# Altium PCB led_matrix_board.PcbDoc (part 1 of 2)
Units mm, origin at the board's own origin, x right, y up, seen from the top; angles counter-clockwise.
Board outline 57.94 x 73.23 mm, 4 copper layers (Top Layer, Layer 1, Layer 2, Bottom Layer), stack 0.974 mm thick; 32 components, 45 nets, 161 pads, 635 vias.
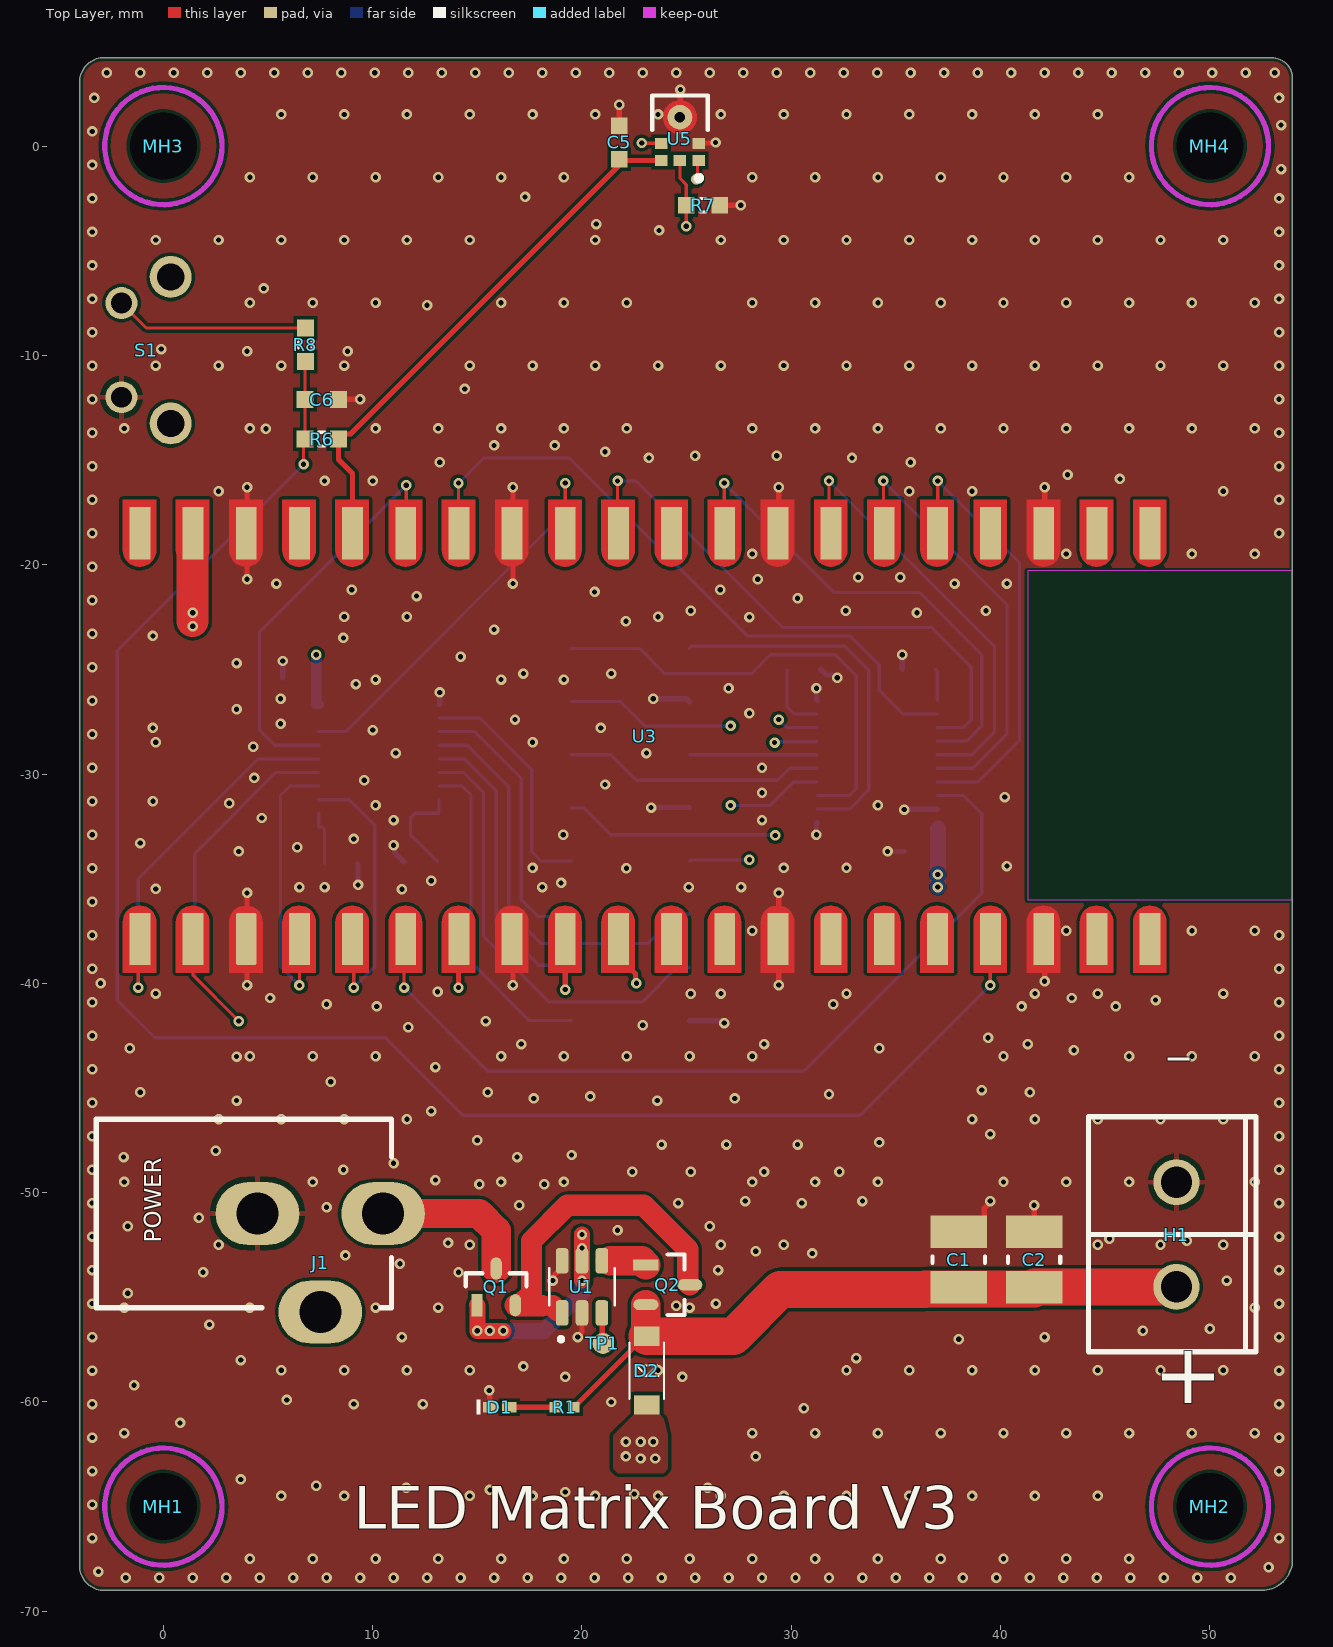
[diagram p0: Top Layer view]
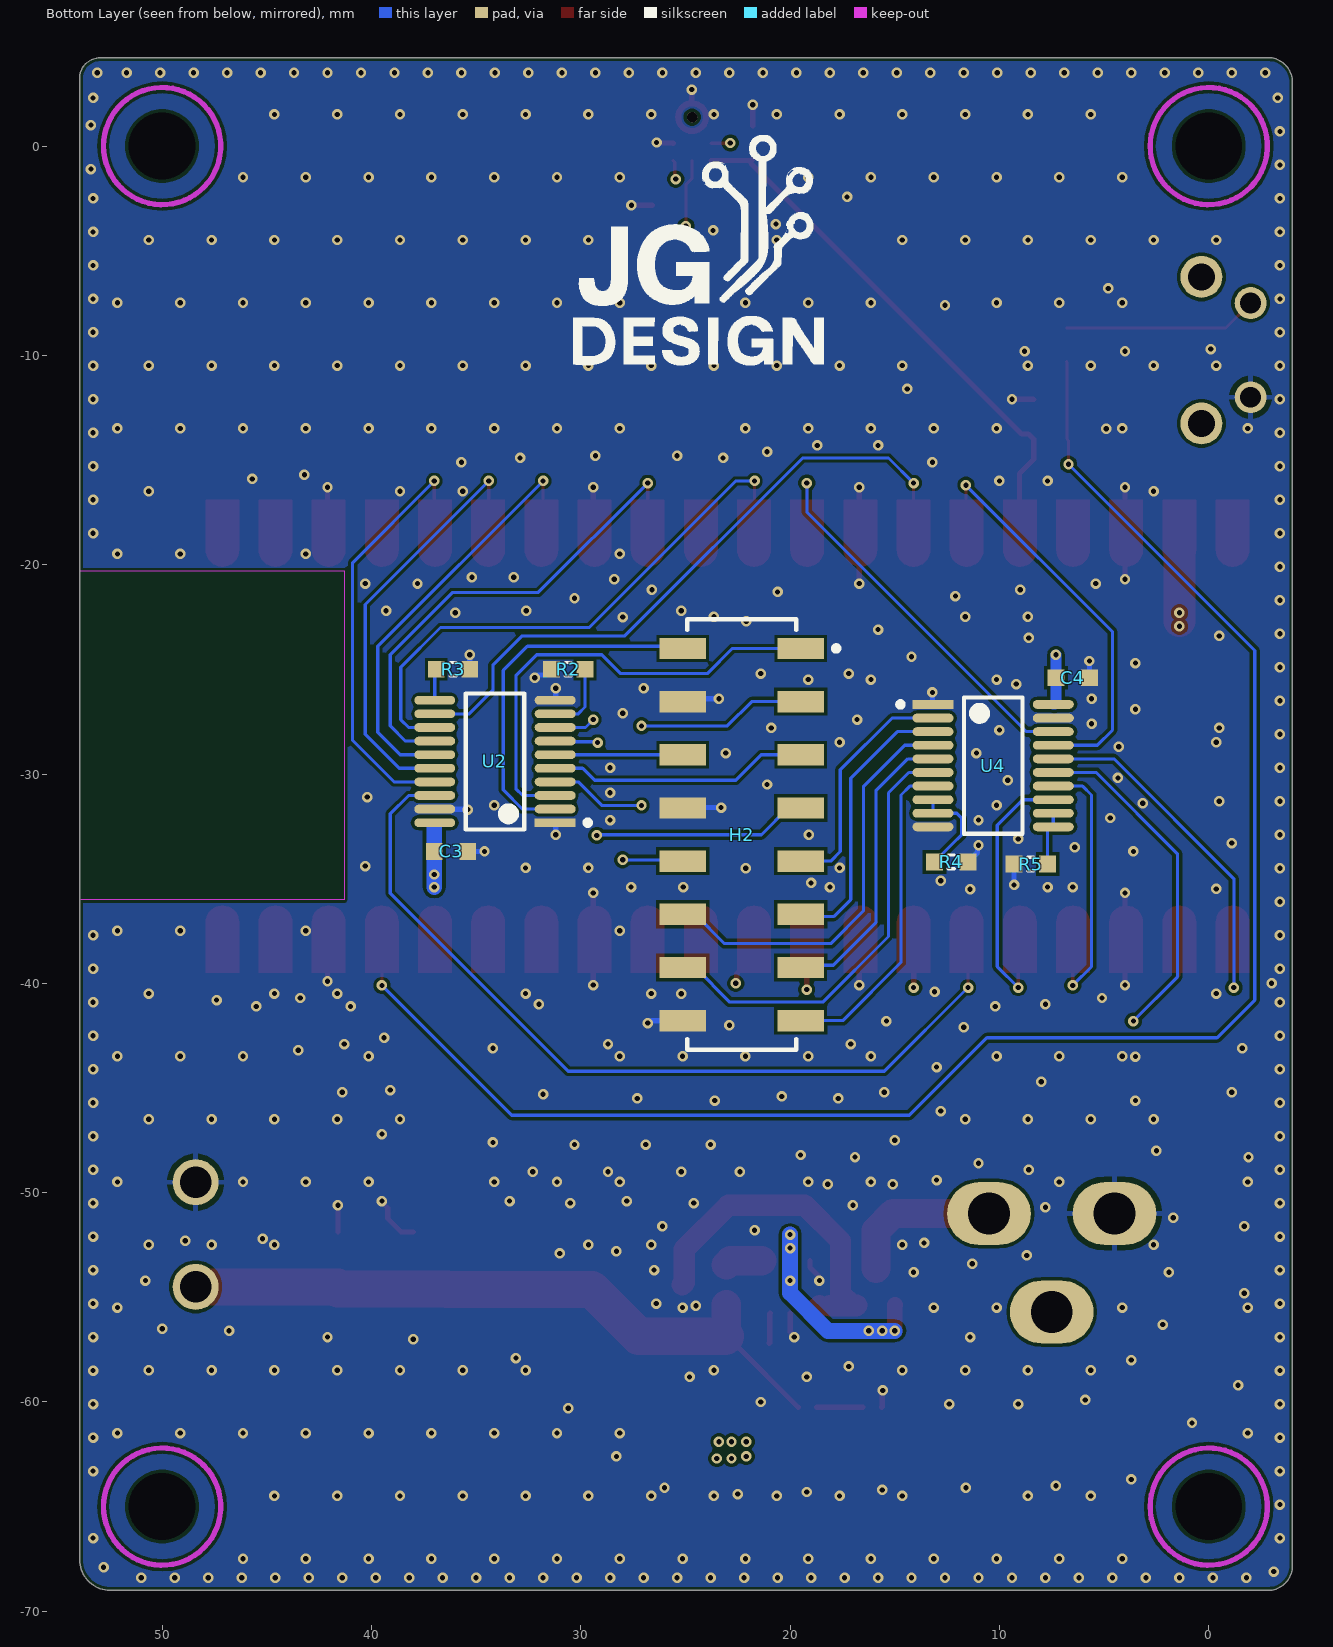
[diagram p1: Bottom Layer view, seen from below]
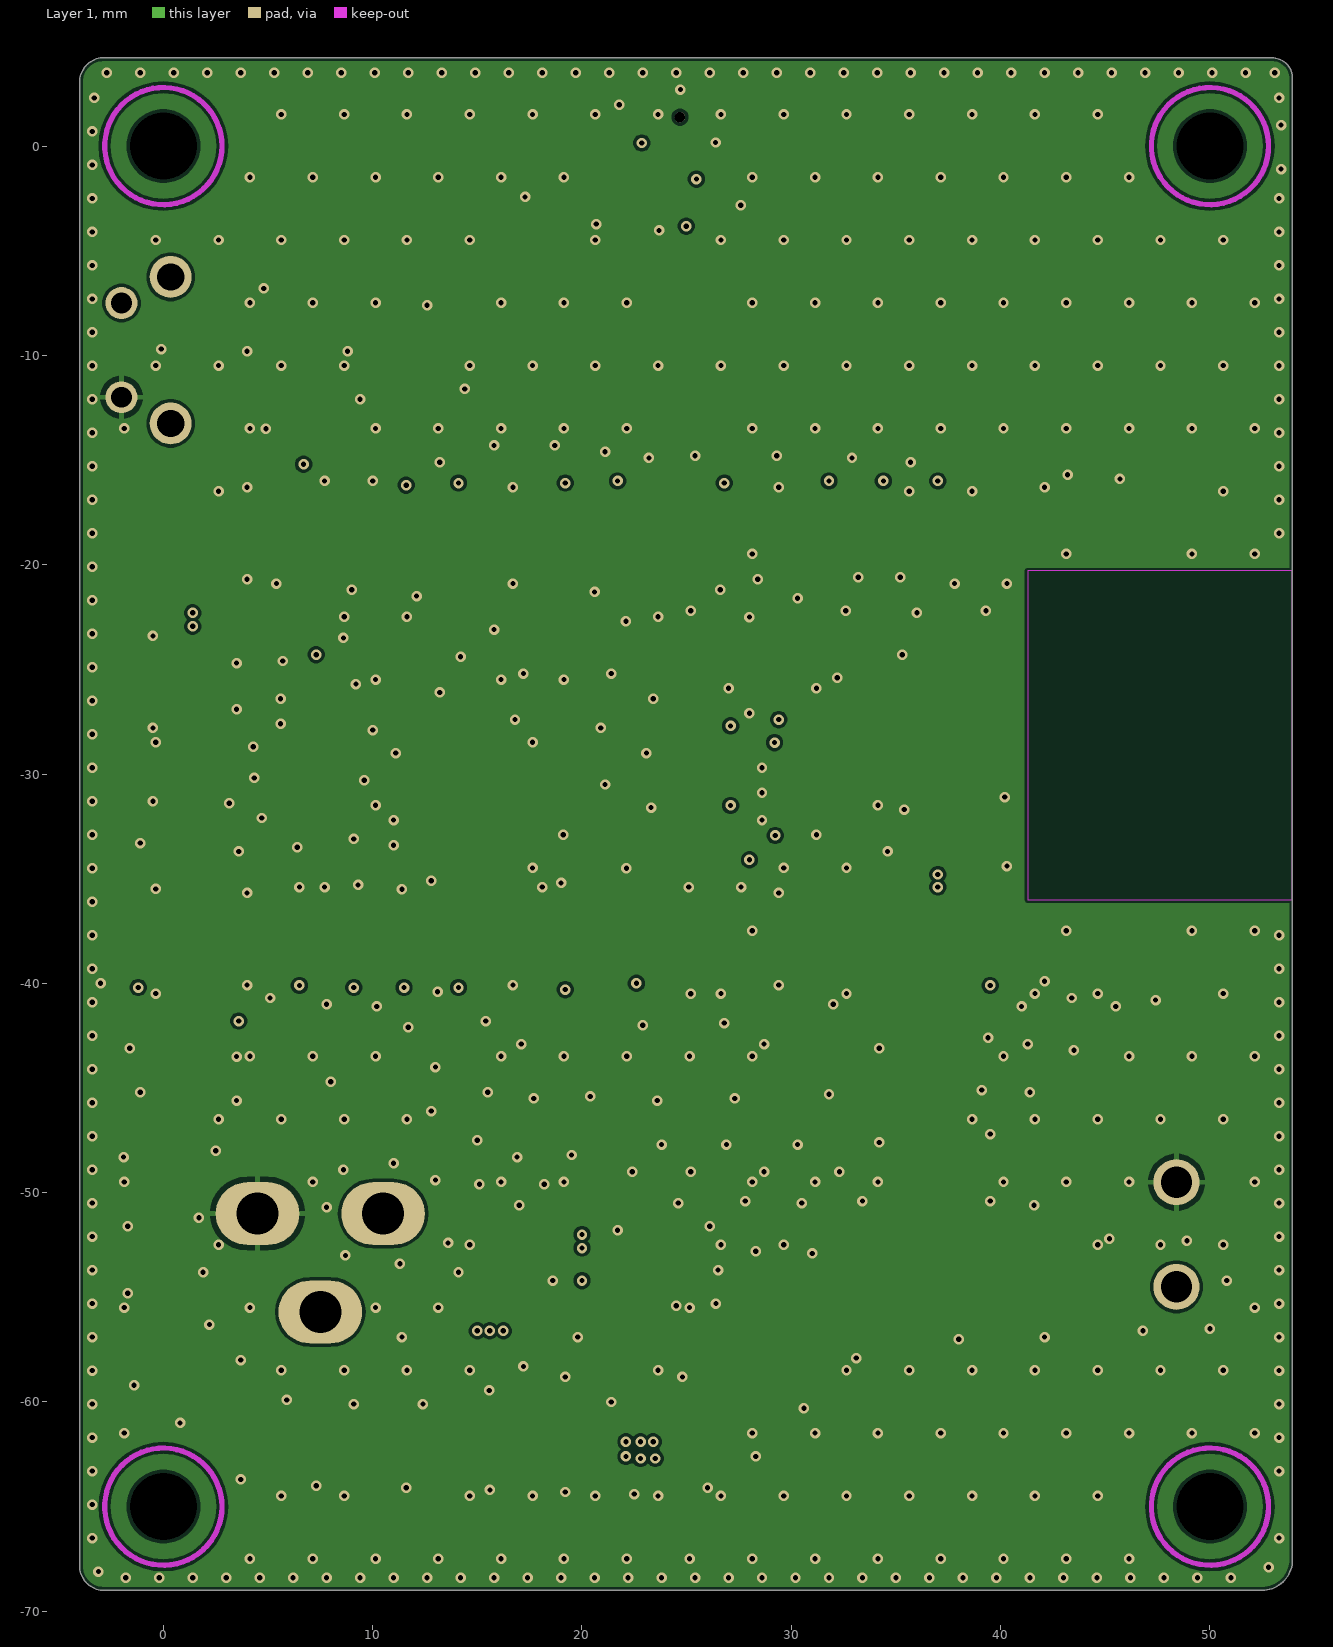
[diagram p2: Layer 1]
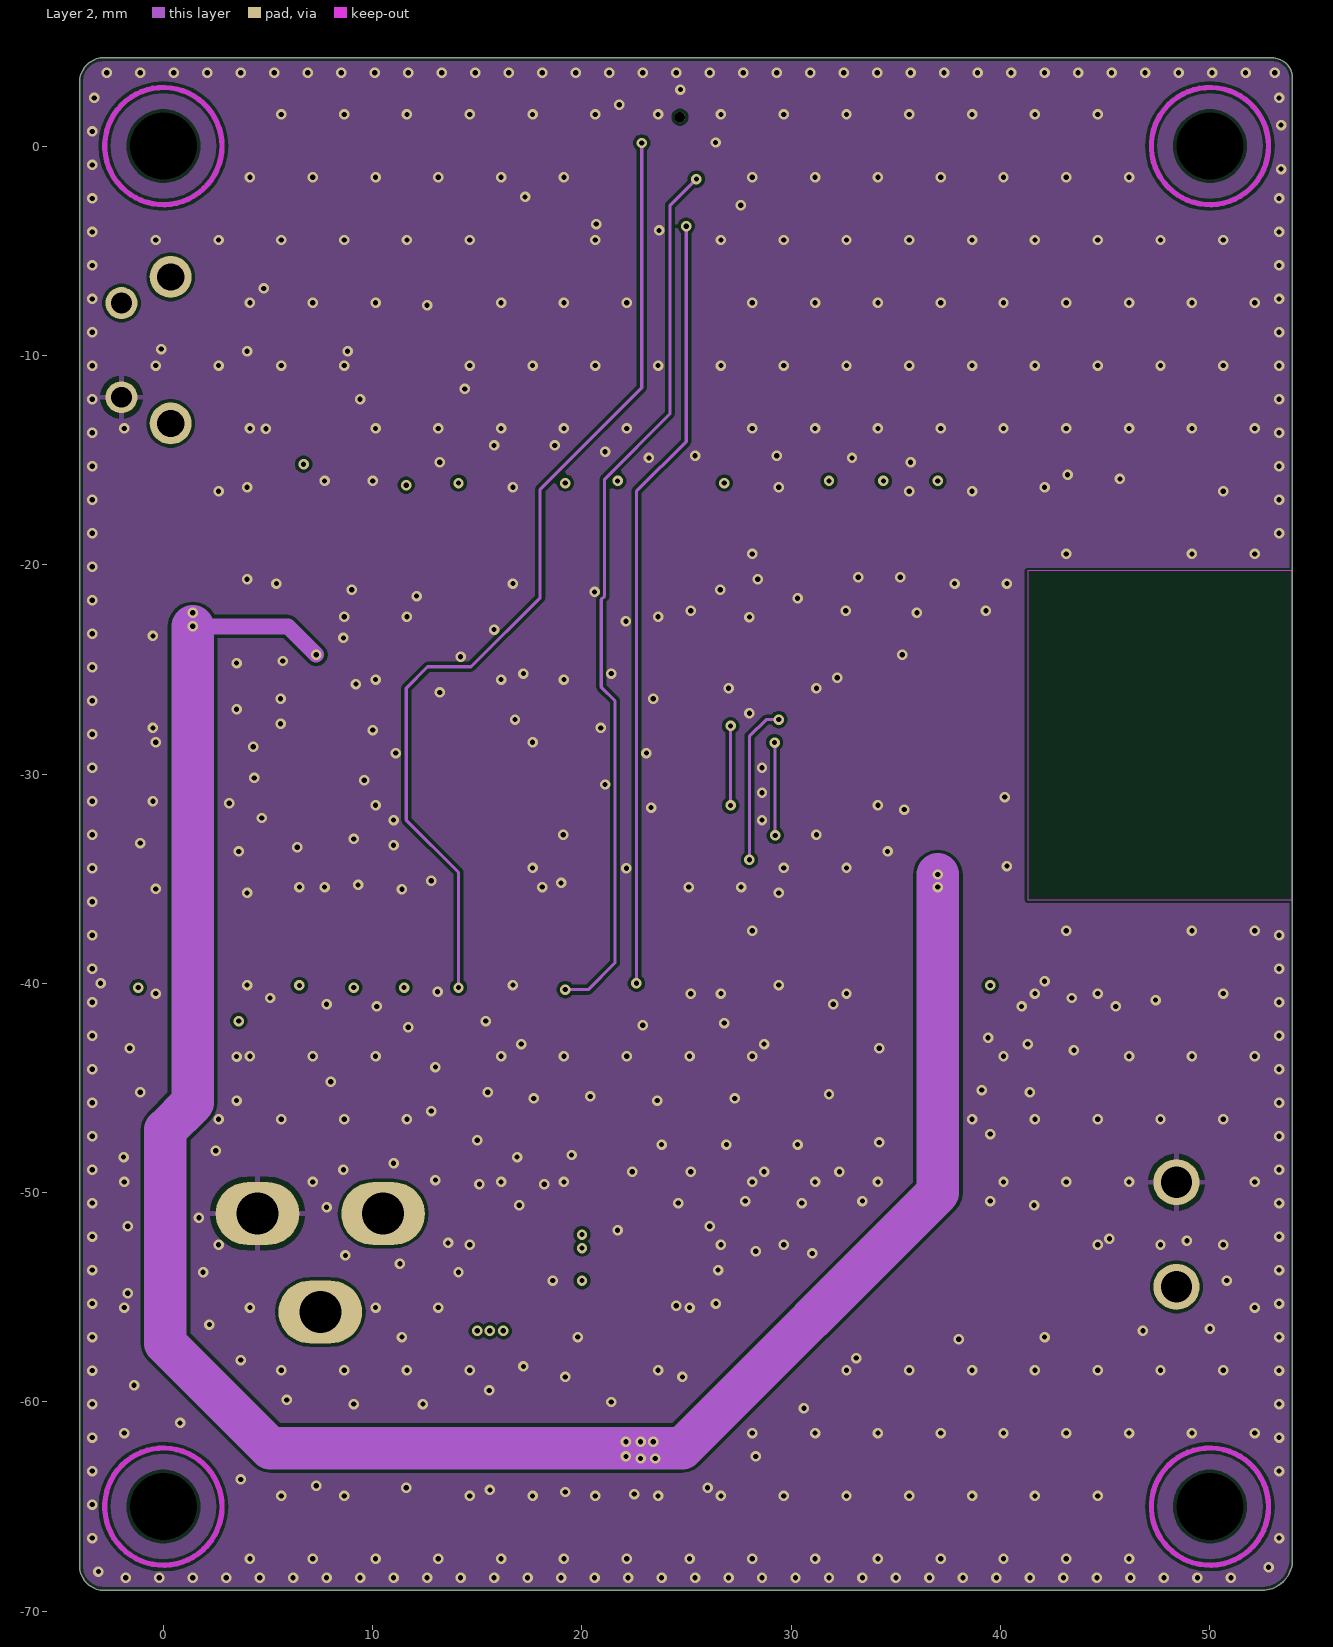
[diagram p3: Layer 2]
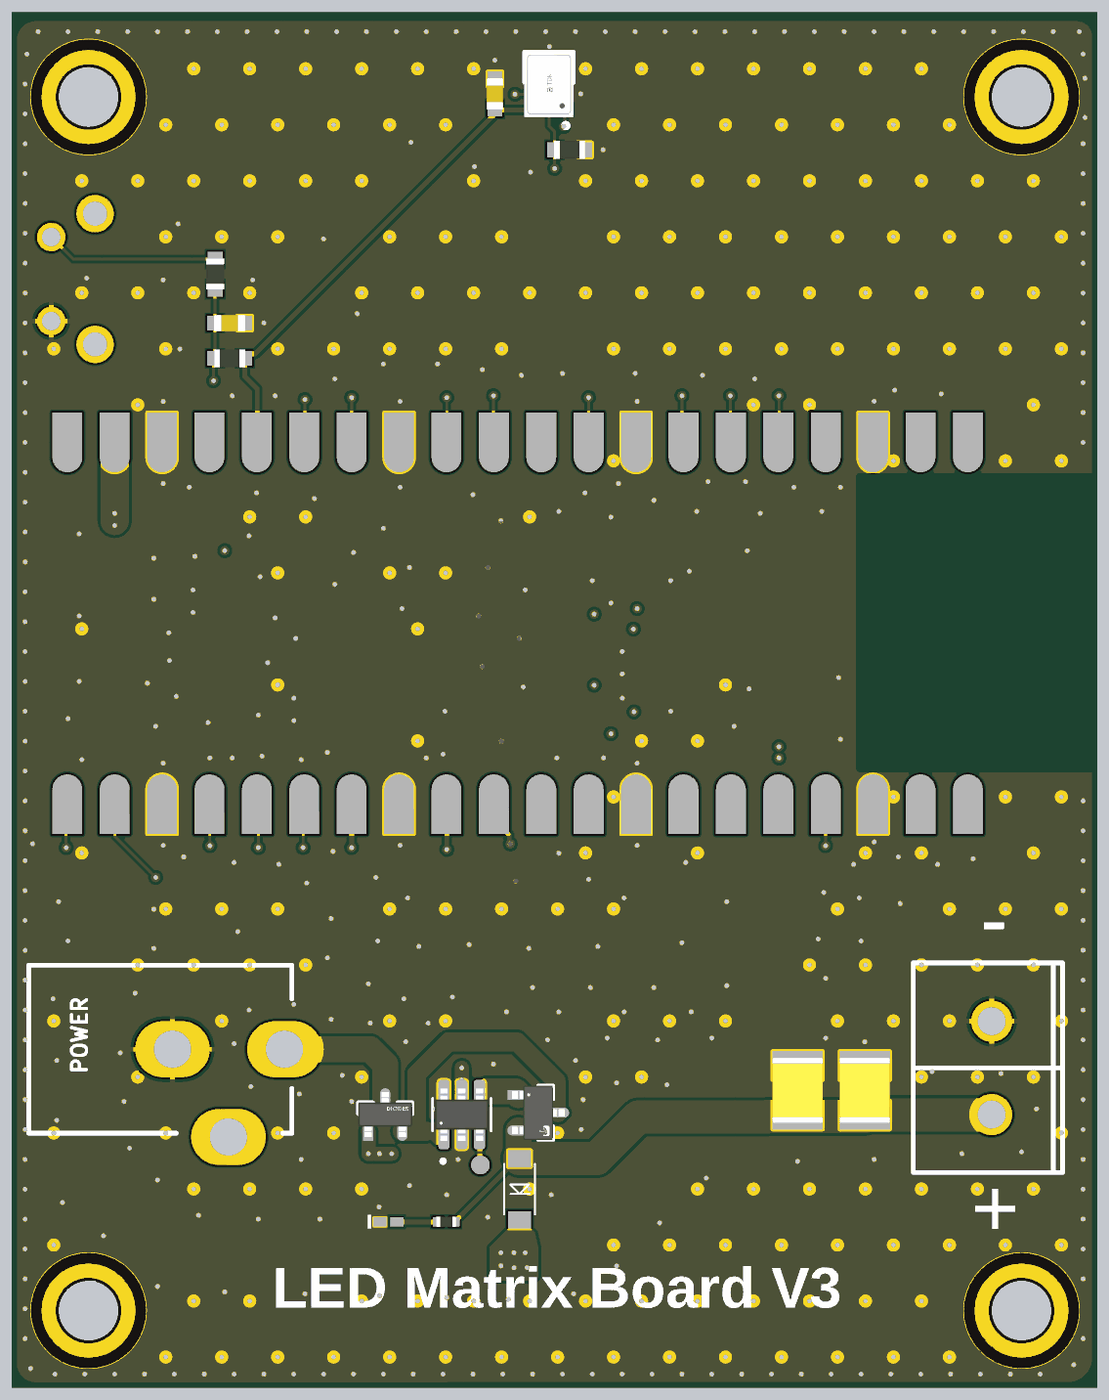
[diagram p4: 3D render of the assembled board from above, using the file's embedded part models]
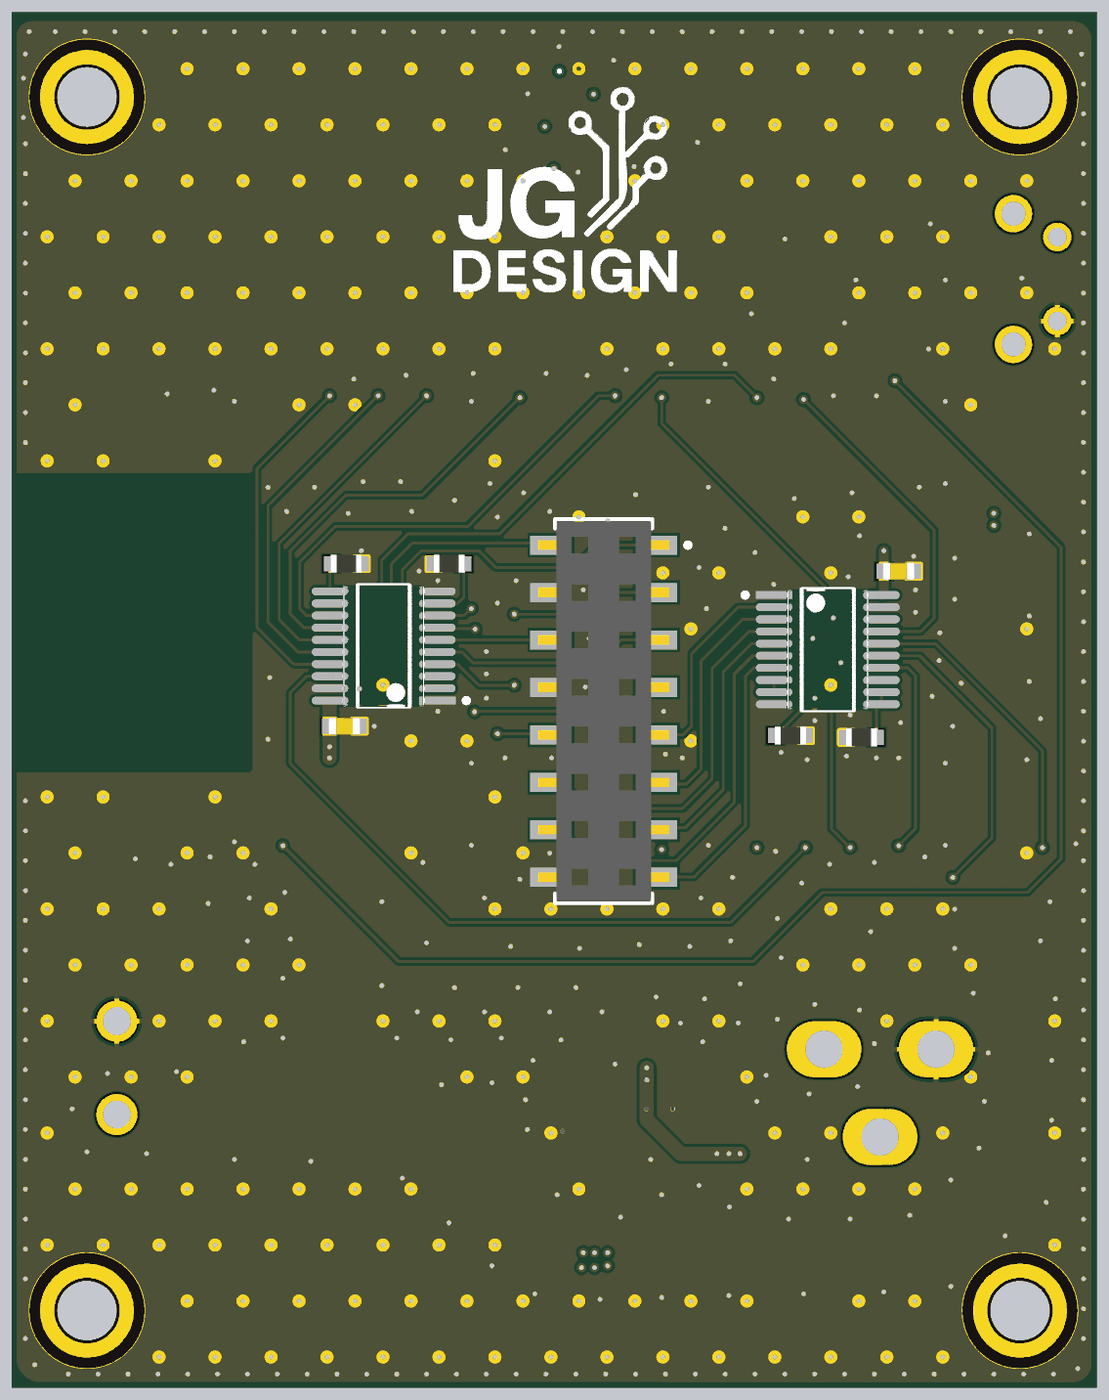
[diagram p5: 3D render of the assembled board from below, using the file's embedded part models]

## Layer stack, top to bottom
Top Solder: solder mask 0.02, PSR-4000-BN-Colour, Dk 4
Top Layer: signal copper 0.035
Dielectric 1: prepreg 0.0711, PP-006, Dk 4.1
Layer 1: signal copper 0.035
Dielectric 2: core 0.692, Core, Dk 4.29
Layer 2: signal copper 0.035
Dielectric 3: prepreg 0.0711, PP-006, Dk 4.1
Bottom Layer: signal copper 0.035
Bottom Solder: solder mask 0.02, PSR-4000-BN-Colour, Dk 4

## Board outline
-4,-67.824 ccw(c-2.824,-67.824) -2.824,-69 -2.827,-69 52.489,-69 52.489,-68.992 ccw(c52.489,-67.539) 53.942,-67.539 53.942,3.241 ccw(c52.967,3.241) 52.967,4.216 52.967,4.225 -2.824,4.225 ccw(c-2.824,3.049) -4,3.049

## Design rules (kind name [scope] priority, off if disabled: settings)
AcuteAngle [All] p1: minimum=4.50000000000000E+0001 checktracksonly=FALSE
AssemblyTestPointUsage [All] p1 off:
AssemblyTestpoint [All] p1 off: testpointundercomponent=TRUE minsize=1.016 maxsize=2.54 preferedsize=1.524 minholesize=0 maxholesize=1.016 preferedholesize=0.813 testpointgrid=0.025 usegrid=TRUE gridtolerance=0 allowsidetop=TRUE allowsidebottom=TRUE
BoardOutlineClearance BoardOutlineClearance_H2 [InComponent('H2')] p1: gap=0 ignorepadtopadclearanceinfootprint=FALSE
BoardOutlineClearance [(not OnTopSilkscreen) AND (NOT OnBottomSilkscreen) and (not OnMultiLayer)    and  (not IsText)] p2: gap=0.152 ignorepadtopadclearanceinfootprint=FALSE
Clearance Clearance_USB [InDifferentialPair('USB_D')] p1: gap=0.134 ignorepadtopadclearanceinfootprint=TRUE except(0.5: Arc-Poly Track-Poly SMDPad-Poly)
Clearance Clearance_RF_Poly [(InPolygon) vs InNetClass('RF-Net')] p2: gap=0.186 ignorepadtopadclearanceinfootprint=TRUE
Clearance Clearance_RF [InNetClass('RF-Net')] p3: gap=0.186 ignorepadtopadclearanceinfootprint=TRUE
Clearance [All] p4: gap=0.152 ignorepadtopadclearanceinfootprint=TRUE
ComponentClearance ComponentClearance_1 [All vs HasFootprint('FP-QPC02SXGN-RC-MFG')] p1: gap=0 collisioncheckmode=3 verticalgap=-0.025 showdistances=FALSE
ComponentClearance ComponentClearance_2 [All vs HasFootprint('TP_40_SMT')] p2: gap=0 collisioncheckmode=3 verticalgap=-0.025 showdistances=FALSE
ComponentClearance [All] p3: gap=0.254 collisioncheckmode=3 verticalgap=0.254 showdistances=FALSE
DiffPairsRouting [InDifferentialPair('USB_D')] p1: maxlimit=0.134 minlimit=0.134 mostfreqgap=0.134 toplayer_minwidth=0.28 toplayer_maxwidth=0.28 toplayer_prefwidth=0.28 midlayer1_minwidth=0.381 midlayer1_maxwidth=0.381 midlayer1_prefwidth=0.381 midlayer2_minwidth=0.381 midlayer2_maxwidth=0.381 midlayer2_prefwidth=0.381 bottomlayer_minwidth=0.28 bottomlayer_maxwidth=0.28 bottomlayer_prefwidth=0.28 impedanceprofiledriven=TRUE maxuncoupledlength=12.7
FabricationTestPointUsage [All] p1 off: valid=0 allowmultiple=FALSE
FabricationTestpoint [All] p1 off: side=3 testpointundercomponent=TRUE minsize=1.016 maxsize=2.54 preferedsize=1.524 minholesize=0 maxholesize=1.016 preferedholesize=0.813 testpointgrid=0.025 allowsidetop=TRUE allowsidebottom=TRUE usegrid=TRUE gridtolerance=0
FanoutControl Fanout_BGA [IsBGA] p1 off: bgadir=Out bgaviamode=Centered fanoutstyle=Auto fanoutdirection=Alternating viagrid=0.025 // Fanout_BGA (Default Rule)
FanoutControl Fanout_LCC [IsLCC] p2 off: bgadir=Out bgaviamode=Centered fanoutstyle=Auto fanoutdirection=Alternating viagrid=0.025 // Fanout_LCC (Default Rule)
FanoutControl Fanout_SOIC [IsSOIC] p3 off: bgadir=Out bgaviamode=Centered fanoutstyle=Auto fanoutdirection=Alternating viagrid=0.025 // Fanout_SOIC (Default Rule)
FanoutControl Fanout_Small [(CompPinCount < 5)] p4 off: bgadir=Out bgaviamode=Centered fanoutstyle=Auto fanoutdirection=OutThenIn viagrid=0.025 // Fanout_Small (Default Rule)
FanoutControl Fanout_Default [All] p5 off: bgadir=Out bgaviamode=Centered fanoutstyle=Auto fanoutdirection=Alternating viagrid=0.025 // Fanout_Default (Default Rule)
Height TP1 [InComponent('TP1')] p1: minheight=0 maxheight=12 prefheight=3
Height [All] p2 off: minheight=0 maxheight=25.4 prefheight=12.7
HoleSize [All] p1: absolutevalues=TRUE maxlimit=5.08 minlimit=0.2 maxpercent=80.000 minpercent=20.000
HoleToHoleClearance [All] p1: gap=0.203 allowstackedmicrovias=TRUE
LayerPairs [All] p1 off: enforce=TRUE
MatchedLengths MatchedLengths_QSPI [InNetClass('QSPI')] p1: tolerance=5 checknetsindiffpair=FALSE checkdiffpairvsdiffpair=TRUE checkxsignals=TRUE checkothers=TRUE
MatchedLengths MatchLengths_U1_Passives_J5 [InNetClass('SDIO')] p2: tolerance=2.54 checknetsindiffpair=FALSE checkdiffpairvsdiffpair=TRUE checkxsignals=TRUE checkothers=TRUE
MinimumSolderMaskSliver [not InComponent('H6')] p1: minsoldermaskwidth=0.06
PlaneClearance [All] p1: clearance=0.254
PlaneConnect [All] p1: pad.planeconnectstyle=Relief pad.reliefexpansion=0.508 pad.reliefentries=4 pad.reliefconductorwidth=0.254 pad.reliefairgap=0.254 via.planeconnectstyle=Direct via.reliefexpansion=0.508 via.reliefentries=4 via.reliefconductorwidth=0.254 via.reliefairgap=0.254
PolygonConnect [All] p1: thpad.connectstyle=Relief thpad.reliefconductorwidth=0.254 thpad.reliefentries=4 thpad.polygonreliefangle="90 Angle" thpad.airgapwidth=0.254 smdpad.connectstyle=Direct smdpad.reliefconductorwidth=0.254 smdpad.reliefentries=4 smdpad.polygonreliefangle="90 Angle" smdpad.airgapwidth=0.254 via.connectstyle=Direct via.reliefconductorwidth=0.254 via.reliefentries=4 via.polygonreliefangle="90 Angle" via.airgapwidth=0.254
RoutingVias [All] p1: holewidth=0.3 width=0.6 viastyle="Through Hole" minholewidth=0.2 minwidth=0.4 maxholewidth=0.711 maxwidth=1.27
SilkToSilkClearance [All] p1 off: silktosilkclearance=0.203
SilkToSolderMaskClearance [IsPad] p1 off: minsilkscreentomaskgap=0.102 clearancetoexposedcopper=TRUE
SolderMaskExpansion [All] p1: expansion=0.102 istentingtop=FALSE
SupplyNets "Schematic Supply Nets_1" [InNet('DC_IN')] p1: voltage=0.000
SupplyNets "Schematic Supply Nets" [InNet('+5V_OUT')] p2: voltage=0.000
SupplyNets "Schematic Supply Nets_7" [InNet('+5V')] p3: voltage=0.000
SupplyNets "Schematic Supply Nets_6" [InNet('+3V3')] p4: voltage=0.000
SupplyNets "Schematic Supply Nets_5" [InNet('GND')] p5: voltage=0.000
UnConnectedPin [All] p1 off:
UnRoutedNet [All] p1: checkbadconnections=TRUE
Width "RF Width" [InNetClass('RF-Net')] p1: maxlimit=0.9 minlimit=0.178 preferedwidth=0.8 toplayer_minwidth=0.8 toplayer_maxwidth=0.8 impedanceprofiledriven=TRUE impedanceprofileid={2BAD1660-FF1E-4629-AB45-93BC2CD73358} impedanceprofilevalue=50.000000 minimp=50.000000 maximp=50.000000 favimp=50.000000
Width [All] p2: maxlimit=2.54 minlimit=0.152 preferedwidth=0.254 midlayer1_prefwidth=0.203 midlayer2_prefwidth=0.203 minimp=50.000000 maximp=50.000000 favimp=50.000000
9 further rules are at their usual default settings.

## Classes and differential pairs
component class PCB_PATTERN: MH1 MH2 MH3 MH4 TP1
component class led_matrix_board: C1 C2 C3 C4 C5 C6 D1 D2 H1 H2 J1 MH1 MH2 MH3 MH4 Q1 Q2 R1 R5 R6 R7 R8 S1 TP1 U2 U4 U5
component class CHIP_OTHER: C1 C2 C3 C4 C5 C6 D1 R8
component class COMP_OTHER: D2 H1 J1 S1
component class CHIP_MICRO: R1 R5 R6 R7 R8

## Components (designator, comment, footprint, x,y, rotation, side; value= is the part's Value field where it differs from the comment)
C1 "CL32A107MPVNNNE" CAPC3225X20N 38,-53.2 r90 top value=100uF
C2 "CL32A107MPVNNNE" CAPC3225X20N 41.6,-53.2 r90 top value=100uF
C3 "C0603C104K8RACTU" 0603_cap 36.2,-33.7 r180 bottom value=100nF
C4 "C0603C104K8RACTU" 0603_cap 6.5,-25.4 r180 bottom value=100nF
C5 "C0603C104K8RACTU" 0603_cap 21.78,0.171 r90 top value=100nF
C6 "C0603C104K8RACTU" 0603_cap 7.565,-12.108 r0 top value=100nF
D1 "XZVGR68W-3" LED_0402_GREEN 16.069,-60.25 r180 top value=Green
D2 "MBR120VLSFT1" SOD-123FL 23.1,-58.5 r90 top value="MBR120VLSFT1, Schottky"
H1 "OSTTC020162" SCREW_TERM_2WAY_5MM 48.4,-54.5 r90 top
H2 "SSM-108-L-DV-K-TR" FP-SSM-108-L-DV-K-TR-MFG 22.31,-32.89 r270 bottom
J1 "PJ-102A" PJ-102A 4.5,-51 r0 top
MH1 "PAD0008" MH_600_320_NPTH 0,-65 r0 top
MH2 "PAD0008" MH_600_320_NPTH 50,-65 r0 top
MH3 "PAD0008" MH_600_320_NPTH 0,0 r0 top
MH4 "PAD0008" MH_600_320_NPTH 50,0 r0 top
Q1 "DMP3099L-7" FP-SOT23-IPC_C#1 15.9,-54.5 r90 top
Q2 "AO3400A" FP-SOT23-IPC_C#2 24.1,-54.4 r0 top
R1 "MCR01MZPF3300" 0402_res 19.169,-60.25 r0 top value=330R
R2 "ERJ-3GEY0R00V" 0603_res 30.6,-25 r180 bottom value=0R
R3 "ERJ-3GEY0R00V" 0603_res 36.1,-25 r0 bottom value=0R
R4 "ERJ-3GEY0R00V" 0603_res 12.3,-34.2 r0 bottom value=0R
R5 "ERJ-3GEY0R00V" 0603_res 8.5,-34.3 r0 bottom value=0R
R6 "0603WAF1002T5E" 0603_res 7.565,-14 r180 top value=10k
R7 "0603WAF1003T5E" 0603_res 25.78,-2.829 r0 top value=100k
R8 "ERA-3AEB102V" 0603_res 6.788,-9.49 r90 top value=1k
S1 "EVQ-PF206K" EVQ-PF206K 0.5,-9.75 r270 top
TP1 "PAD0035" TP_40_SMT 21,-57.2 r90 top
U1 "MAX4866LEUT+T" MAX4866LEUT+T-Footprint-1 20,-54.5 r90 top
U2 "SN74AHCT245PWR" FP-PW0020A-IPC_A 34.1,-29.4 r0 bottom
U3 "ESP32-S3-Pico" ESP32-S3-Pico -1.12,-37.88 r90 top
U4 "SN74AHCT245PWR" FP-PW0020A-IPC_A 10.3,-29.6 r180 bottom
U5 "ICS-43434" FP-ICS-43434-MFG 24.68,0.671 r90 top

## Footprints (in the part's own frame and the unit in brackets; to place one, negate y for a bottom-side part, rotate by r counter-clockwise, add the part's x,y. Pads: shape width x height; smd on the part's side, far side on the other; paste and mask are expansions set on the pad)
0402_res [mil]
  rect 22x20 smd: 1(-17,0) 2(17,0)
  body extent -21,-11 21,11, height 16
0603_cap [mm]
  rect 0.8x0.8 smd: 1(-0.8,0) 2(0.8,0)
  body extent -0.85,-0.45 0.85,0.45, height 0.9
0603_res [mm]
  rect 0.8x0.8 smd: 1(-0.8,0) 2(0.8,0)
  silkscreen extent -0.15,-0.33 0.15,0.33, body extent -0.82,-0.48 0.82,0.48, height 0.55
CAPC3225X20N [mm] "Chip Capacitor, 2-Leads, Body 3.20x2.50mm, IPC Medium Density"
  rect 1.55x2.7 smd: 1(-1.325,0) 2(1.325,0)
  silkscreen extent -0.15,-1.25 0.15,1.25, body extent -1.75,-1.35 1.75,1.35, height 2
ESP32-S3-Pico [mm]
  rect 2.5x1 smd mask+0.102: 1(0,0) 2(0,-2.54) 4(0,-7.62) 5(0,-10.16) 6(0,-12.7) 7(0,-15.24) 8(0,-17.78) 9(0,-20.32) 10(0,-22.86) 11(0,-25.4) 12(0,-27.94) 13(0,-30.48) 14(0,-33.02) 15(0,-35.56) 16(0,-38.1) 17(0,-40.64) 18(0,-43.18) 19(0,-45.72) 20(0,-48.26)
  rrect25% 2.5x1 smd mask+0.102: 3(0,-5.08)
  rect 2.5x1 smd: 21(19.38,-48.26) 22(19.38,-45.72) 23(19.38,-43.18) 24(19.38,-40.64) 25(19.38,-38.1) 26(19.38,-35.56) 27(19.38,-33.02) 28(19.38,-30.48) 29(19.38,-27.94) 30(19.38,-25.4) 31(19.38,-22.86) 32(19.38,-20.32) 33(19.38,-17.78) 34(19.38,-15.24) 35(19.38,-12.7) 36(19.38,-10.16) 37(19.38,-7.62) 38(19.38,-5.08) 39(19.38,-2.54) 40(19.38,0)
  Top Layer region: -1.602,-49.044 -1.602,-47.444 0.798,-47.444 0.798,-47.444 1.145,-47.523 1.423,-47.745 1.578,-48.066 1.578,-48.422 1.423,-48.743 1.145,-48.965 0.798,-49.044 0.798,-49.044
  Top Layer region: -1.602,-46.504 -1.602,-44.904 0.798,-44.904 0.798,-44.904 1.145,-44.983 1.423,-45.205 1.578,-45.526 1.578,-45.882 1.423,-46.203 1.145,-46.425 0.798,-46.504 0.798,-46.504
  Top Layer region: -1.602,-43.964 -1.602,-42.364 0.798,-42.364 0.798,-42.364 1.145,-42.443 1.423,-42.665 1.578,-42.986 1.578,-43.342 1.423,-43.663 1.145,-43.885 0.798,-43.964 0.798,-43.964
  Top Layer region: -1.602,-41.424 -1.602,-39.824 0.798,-39.824 0.798,-39.824 1.145,-39.903 1.423,-40.125 1.578,-40.446 1.578,-40.802 1.423,-41.123 1.145,-41.345 0.798,-41.424 0.798,-41.424
  Top Layer region: -1.602,-38.884 -1.602,-37.284 0.798,-37.284 0.798,-37.284 1.145,-37.363 1.423,-37.585 1.578,-37.906 1.578,-38.262 1.423,-38.583 1.145,-38.805 0.798,-38.884 0.798,-38.884
  Top Layer region: -1.602,-36.344 -1.602,-34.744 0.798,-34.744 0.798,-34.744 1.145,-34.823 1.423,-35.045 1.578,-35.366 1.578,-35.722 1.423,-36.043 1.145,-36.265 0.798,-36.344 0.798,-36.344
  Top Layer region: -1.602,-33.804 -1.602,-32.204 0.798,-32.204 0.798,-32.204 1.145,-32.283 1.423,-32.505 1.578,-32.826 1.578,-33.182 1.423,-33.503 1.145,-33.725 0.798,-33.804 0.798,-33.804
  Top Layer region: -1.602,-31.264 -1.602,-29.664 0.798,-29.664 0.798,-29.664 1.145,-29.743 1.423,-29.965 1.578,-30.286 1.578,-30.642 1.423,-30.963 1.145,-31.185 0.798,-31.264 0.798,-31.264
  Top Layer region: -1.602,-28.724 -1.602,-27.124 0.798,-27.124 0.798,-27.124 1.145,-27.203 1.423,-27.425 1.578,-27.746 1.578,-28.102 1.423,-28.423 1.145,-28.645 0.798,-28.724 0.798,-28.724
  Top Layer region: -1.602,-26.184 -1.602,-24.584 0.798,-24.584 0.798,-24.584 1.145,-24.663 1.423,-24.885 1.578,-25.206 1.578,-25.562 1.423,-25.883 1.145,-26.105 0.798,-26.184 0.798,-26.184
  Top Layer region: -1.602,-23.644 -1.602,-22.044 0.798,-22.044 0.798,-22.044 1.145,-22.123 1.423,-22.345 1.578,-22.666 1.578,-23.022 1.423,-23.343 1.145,-23.565 0.798,-23.644 0.798,-23.644
  Top Layer region: -1.602,-21.104 -1.602,-19.504 0.798,-19.504 0.798,-19.504 1.145,-19.583 1.423,-19.805 1.578,-20.126 1.578,-20.482 1.423,-20.803 1.145,-21.025 0.798,-21.104 0.798,-21.104
  Top Layer region: -1.602,-18.564 -1.602,-16.964 0.798,-16.964 0.798,-16.964 1.145,-17.043 1.423,-17.265 1.578,-17.586 1.578,-17.942 1.423,-18.263 1.145,-18.485 0.798,-18.564 0.798,-18.564
  Top Layer region: -1.602,-16.024 -1.602,-14.424 0.798,-14.424 0.798,-14.424 1.145,-14.503 1.423,-14.725 1.578,-15.046 1.578,-15.402 1.423,-15.723 1.145,-15.945 0.798,-16.024 0.798,-16.024
  Top Layer region: -1.602,-5.864 -1.602,-4.264 0.798,-4.264 0.798,-4.264 1.145,-4.343 1.423,-4.565 1.578,-4.886 1.578,-5.242 1.423,-5.563 1.145,-5.785 0.798,-5.864 0.798,-5.864
  Top Layer region: 20.982,-0.784 20.982,0.816 18.582,0.816 18.582,0.816 18.235,0.737 17.957,0.515 17.802,0.194 17.802,-0.162 17.957,-0.483 18.235,-0.705 18.582,-0.784 18.582,-0.784
  Top Layer region: 20.982,-5.864 20.982,-4.264 18.582,-4.264 18.582,-4.264 18.235,-4.343 17.957,-4.565 17.802,-4.886 17.802,-5.242 17.957,-5.563 18.235,-5.785 18.582,-5.864 18.582,-5.864
  Top Layer region: 20.982,-8.404 20.982,-6.804 18.582,-6.804 18.582,-6.804 18.235,-6.883 17.957,-7.105 17.802,-7.426 17.802,-7.782 17.957,-8.103 18.235,-8.325 18.582,-8.404 18.582,-8.404
  Top Layer region: 20.982,-10.944 20.982,-9.344 18.582,-9.344 18.582,-9.344 18.235,-9.423 17.957,-9.645 17.802,-9.966 17.802,-10.322 17.957,-10.643 18.235,-10.865 18.582,-10.944 18.582,-10.944
  Top Layer region: 20.982,-18.564 20.982,-16.964 18.582,-16.964 18.582,-16.964 18.235,-17.043 17.957,-17.265 17.802,-17.586 17.802,-17.942 17.957,-18.263 18.235,-18.485 18.582,-18.564 18.582,-18.564
  Top Layer region: 20.982,-26.184 20.982,-24.584 18.582,-24.584 18.582,-24.584 18.235,-24.663 17.957,-24.885 17.802,-25.206 17.802,-25.562 17.957,-25.883 18.235,-26.105 18.582,-26.184 18.582,-26.184
  Top Layer region: 20.982,-31.264 20.982,-29.664 18.582,-29.664 18.582,-29.664 18.235,-29.743 17.957,-29.965 17.802,-30.286 17.802,-30.642 17.957,-30.963 18.235,-31.185 18.582,-31.264 18.582,-31.264
  Top Layer region: 20.982,-41.424 20.982,-39.824 18.582,-39.824 18.582,-39.824 18.235,-39.903 17.957,-40.125 17.802,-40.446 17.802,-40.802 17.957,-41.123 18.235,-41.345 18.582,-41.424 18.582,-41.424
  Top Layer region: 20.982,-43.964 20.982,-42.364 18.582,-42.364 18.582,-42.364 18.235,-42.443 17.957,-42.665 17.802,-42.986 17.802,-43.342 17.957,-43.663 18.235,-43.885 18.582,-43.964 18.582,-43.964
  Top Layer region: 20.982,-46.504 20.982,-44.904 18.582,-44.904 18.582,-44.904 18.235,-44.983 17.957,-45.205 17.802,-45.526 17.802,-45.882 17.957,-46.203 18.235,-46.425 18.582,-46.504 18.582,-46.504
  Top Layer region: 20.982,-49.044 20.982,-47.444 18.582,-47.444 18.582,-47.444 18.235,-47.523 17.957,-47.745 17.802,-48.066 17.802,-48.422 17.957,-48.743 18.235,-48.965 18.582,-49.044 18.582,-49.044
  Top Layer region: 20.982,-23.644 20.982,-22.044 18.582,-22.044 18.582,-22.044 18.235,-22.123 17.957,-22.345 17.802,-22.666 17.802,-23.022 17.957,-23.343 18.235,-23.565 18.582,-23.644 18.582,-23.644
  Top Layer region: 20.982,-33.804 20.982,-32.204 18.582,-32.204 18.582,-32.204 18.235,-32.283 17.957,-32.505 17.802,-32.826 17.802,-33.182 17.957,-33.503 18.235,-33.725 18.582,-33.804 18.582,-33.804
  Top Layer region: -1.602,-8.404 -1.602,-6.804 0.798,-6.804 0.798,-6.804 1.145,-6.883 1.423,-7.105 1.578,-7.426 1.578,-7.782 1.423,-8.103 1.145,-8.325 0.798,-8.404 0.798,-8.404
  Top Layer region: 20.982,-13.484 20.982,-11.884 18.582,-11.884 18.582,-11.884 18.235,-11.963 17.957,-12.185 17.802,-12.506 17.802,-12.862 17.957,-13.183 18.235,-13.405 18.582,-13.484 18.582,-13.484
  Top Layer region: 20.982,-28.724 20.982,-27.124 18.582,-27.124 18.582,-27.124 18.235,-27.203 17.957,-27.425 17.802,-27.746 17.802,-28.102 17.957,-28.423 18.235,-28.645 18.582,-28.724 18.582,-28.724
  Top Layer region: 20.982,-36.344 20.982,-34.744 18.582,-34.744 18.582,-34.744 18.235,-34.823 17.957,-35.045 17.802,-35.366 17.802,-35.722 17.957,-36.043 18.235,-36.265 18.582,-36.344 18.582,-36.344
  Top Layer region: 20.982,-38.884 20.982,-37.284 18.582,-37.284 18.582,-37.284 18.235,-37.363 17.957,-37.585 17.802,-37.906 17.802,-38.262 17.957,-38.583 18.235,-38.805 18.582,-38.884 18.582,-38.884
  Top Layer region: -1.602,-3.324 -1.602,-1.724 0.798,-1.724 0.798,-1.724 1.145,-1.803 1.423,-2.025 1.578,-2.346 1.578,-2.702 1.423,-3.023 1.145,-3.245 0.798,-3.324 0.798,-3.324
  Top Layer region: -1.602,-13.484 -1.602,-11.884 0.798,-11.884 0.798,-11.884 1.145,-11.963 1.423,-12.185 1.578,-12.506 1.578,-12.862 1.423,-13.183 1.145,-13.405 0.798,-13.484 0.798,-13.484
  Top Layer region: 20.982,-21.104 20.982,-19.504 18.582,-19.504 18.582,-19.504 18.235,-19.583 17.957,-19.805 17.802,-20.126 17.802,-20.482 17.957,-20.803 18.235,-21.025 18.582,-21.104 18.582,-21.104
  Top Layer region: -1.602,-10.944 -1.602,-9.344 0.798,-9.344 0.798,-9.344 1.145,-9.423 1.423,-9.645 1.578,-9.966 1.578,-10.322 1.423,-10.643 1.145,-10.865 0.798,-10.944 0.798,-10.944
  Top Layer region: 20.982,-16.024 20.982,-14.424 18.582,-14.424 18.582,-14.424 18.235,-14.503 17.957,-14.725 17.802,-15.046 17.802,-15.402 17.957,-15.723 18.235,-15.945 18.582,-16.024 18.582,-16.024
  Top Layer region: 20.982,-3.324 20.982,-1.724 18.582,-1.724 18.582,-1.724 18.235,-1.803 17.957,-2.025 17.802,-2.346 17.802,-2.702 17.957,-3.023 18.235,-3.245 18.582,-3.324 18.582,-3.324
  Top Layer region: -1.602,-0.784 -1.602,0.816 0.798,0.816 0.798,0.816 1.145,0.737 1.423,0.515 1.578,0.194 1.578,-0.162 1.423,-0.483 1.145,-0.705 0.798,-0.784 0.798,-0.784
EVQ-PF206K [mm]
  round 2 hole 1.3: 0(-3.5,-0.15) 0(3.5,-0.15)
  round 1.524 hole 1: 1(-2.25,-2.5) 2(2.25,-2.5)
  body extent -3.75,-8.35 3.75,1.5, height 7.4
FP-ICS-43434-MFG [mm]
  rect 0.522x0.6 smd paste-1000 mask+0: 1(-1.364,-0.9) 2(-0.542,-0.9) 4(-0.542,0.9) 5(-1.364,0.9) 6(-1.364,0)
  round 1.178 smd paste-1000 mask-1000: 3(0.71,0)
  round 0.5 hole 0.5 unplated paste-2539.97 mask+0: ""(0.71,0)
  Top Layer circle w0.3: c0.71,0 r0.663
  silkscreen extent -2.32,-1.33 1.75,1.33, body extent -2.25,-1.83 2.25,1.83, height 0.25
FP-PW0020A-IPC_A [mm]
  rect 1.955x0.421 smd paste+0 mask+0: 1(-2.875,2.925)
  rrect100% 1.955x0.421 smd paste+0 mask+0: 2(-2.875,2.275) 3(-2.875,1.625) 4(-2.875,0.975) 5(-2.875,0.325) 6(-2.875,-0.325) 7(-2.875,-0.975) 8(-2.875,-1.625) 9(-2.875,-2.275) 10(-2.875,-2.925) 11(2.875,-2.925) 12(2.875,-2.275) 13(2.875,-1.625) 14(2.875,-0.975) 15(2.875,-0.325) 16(2.875,0.325) 17(2.875,0.975) 18(2.875,1.625) 19(2.875,2.275) 20(2.875,2.925)
  silkscreen extent -4.55,-3.25 1.4,3.25, body extent -3.2,-3.25 3.2,3.25, height 1.2
FP-SOT23-IPC_C#1 [mm]
  rect 1.059x0.547 smd paste+0 mask+0: 1(-0.877,0.915)
  rrect100% 1.059x0.547 smd paste+0 mask+0: 2(-0.877,-0.915) 3(0.877,0)
  silkscreen extent 0.03,-1.45 0.65,1.45, body extent -1.51,-1.55 1.51,1.55, height 0.25
FP-SOT23-IPC_C#2 [mm]
  rect 1.205x0.532 smd paste+0 mask+0: 1(-1.05,0.95)
  rrect100% 1.205x0.532 smd paste+0 mask+0: 2(-1.05,-0.95) 3(1.05,0)
  silkscreen extent 0,-1.45 0.8,1.45, body extent -1.75,-1.55 1.75,1.55, height 0.25
FP-SSM-108-L-DV-K-TR-MFG [mm]
  rect 1.02x2.22 smd paste+0 mask+0: 1(-8.89,2.825) 2(-8.89,-2.825) 3(-6.35,2.825) 4(-6.35,-2.825) 5(-3.81,2.825) 6(-3.81,-2.825) 7(-1.27,2.825) 8(-1.27,-2.825) 9(1.27,2.825) 10(1.27,-2.825) 11(3.81,2.825) 12(3.81,-2.825) 13(6.35,2.825) 14(6.35,-2.825) 15(8.89,2.825) 16(8.89,-2.825)
  silkscreen extent -10.29,-2.61 10.29,4.63, body extent -10.16,-3.51 10.16,3.51, height 7.46
LED_0402_GREEN [mm]
  rect 0.7x0.5 smd mask+0.051: A(-0.45,0) K(0.45,0)
  silkscreen extent 0.92,-0.38 1.1,0.35, body extent -0.5,-0.25 0.5,0.25, height 0.51
MAX4866LEUT+T-Footprint-1 [mm]
  rrect50% 1.22x0.6 smd paste+0 mask+0.102: 1(-1.245,0.95) 2(-1.245,0) 3(-1.245,-0.95) 4(1.245,-0.95) 5(1.245,0) 6(1.245,0.95)
  silkscreen extent -2.6,-1.57 0.88,1.57, body extent -1.4,-1.45 1.4,1.45, height 1.45
MH_600_320_NPTH [mm] "600x320 Non-plated mount hole"
  round 3 hole 3.2 unplated mask+1.625: 1(0,0)
  Keep-Out Layer circle w0.254: c0,0 r2.8
PJ-102A [mm]
  oval 4x3 hole 2: +(6,0) -(0,0) SW(3,-4.7)
  silkscreen extent -7.7,-4.5 6.4,4.5, body extent -7.7,-4.9 6.4,4.5, height 11
SCREW_TERM_2WAY_5MM [mm]
  round 2.2 hole 1.5: 1(0,0) 2(5,0)
  silkscreen extent -3.1,-3.8 8.12,4.2, body extent -3.1,-3.3 8.1,4.2, height 8.5
SOD-123FL [mm] "Surface Mount Schottky Diode"
  rect 0.91x1.22 smd: A(1.64,0) K(-1.64,0)
  silkscreen extent -1.35,-0.82 1.35,0.82, body extent -1.8,-0.82 1.8,0.82, height 1.01
TP_40_SMT [mm]
  round 1 smd: 1(0,0)

## Part data
C1 C2: library part CAP0047-3, "CAP CER 100UF 10V ±20% X5R 1210", Component Rating=X5R, Package=1210, Tolerance=20%, Voltage=10V, ClassName=CHIP_OTHER, Generic Allowed=Yes, Subtype=Ceramic
C3 C4 C5 C6: library part CAP0030-8, "CAP CER 100NF 10V ±10% X7R 0603", Component Rating=X7R, Package=0603, Tolerance=10%, Voltage=10V, ClassName=CHIP_OTHER, Generic Allowed=Yes, Subtype=Ceramic
D1: library part DIO0053-6, "LED GREEN 0402 SMD", Package=0402, Voltage=2.0V, ClassName=CHIP_OTHER, Generic Allowed=Yes
D2: library part DIO0005-3, "Diodes, MBR120VLSFT1 Schottky 1A 20V, Vf=0.34V", Component Rating=Vf=0.34V, Current=1A, Package=SOD-123FL, Voltage=20V, ClassName=COMP_OTHER, Generic Allowed=No
H1: library part JCK0020-1, "CONN TERM BLOCK 5MM 2POS", Package=THRU-Hole, ClassName=COMP_OTHER, Generic Allowed=Yes
H2: library part HDR0162-1, "PCB Receptacle, Board-to-Board, 2.54 mm, 2 Rows, 16 Contacts, Surface Mount", Color=Black, Current Rating=5.2A, Dielectric Material=Polyamide, Manufacturer Lifecycle Status=PRODUCTION, Max Operating Temperature=125°C, Min Operating Temperature=-55°C, Voltage Rating=572V, Connector Type="Header, Socket", Contact Gender=Female, Contact Material="Gold, Nickel", Contact Plating=Gold, Gender=Receptacle, Height=7.46mm, Housing Color=Black, Housing Material=Nylon, Lead Free="Lead Free", Length=20.8mm, Lifecycle Status=Production, Mounting Technology="Surface Mount", Number of Contacts=16, Number of Positions=16, Number of Rows=2, Packaging="Tape and Reel", Pins=16, Pitch=2.54mm, REACH SVHC=No, RoHS=Compliant, Row Spacing=2.54mm, Terminal Pitch=2.54mm, Termination=Solder, Width=5mm
J1: library part JCK0011-1, "Conn Power Jack 2.1mm PCB Mount Thru-Hole", Package=THRU-Hole, ClassName=COMP_OTHER, Generic Allowed=No
MH1 MH2 MH3 MH4: library part PAD0008-2, "MH 6.00MM DIA 3.2MM HOLE NPTH", ClassName=PCB_PATTERN, Shape=Round
Q1: library part TSR0027-1, "DMP3099L Series 30 V 65 mOhm P-Channel Enhancement Mode Mosfet - SOT-23-3", Case/Package=SOT-23, Continuous Drain Current (ID)=3.8A, Drain to Source Breakdown Voltage=-30V, Drain to Source Resistance=65mΩ, Gate to Source Voltage (Vgs)=20V, Input Capacitance=563pF, Max Junction Temperature (Tj)=150°C, Max Power Dissipation=1.08W, Min Breakdown Voltage=30V, Min Operating Temperature=-55°C, Threshold Voltage=-2.1V, China RoHS=Compliant, Contact Plating=Tin, Drain to Source Voltage (Vdss)=-30V, Element Configuration=Single, Export Control Classification Number (ECCN) Code=EAR99, Fall Time=15ns, Height=1.1mm, Introduction Date=2013-05-28, Lead Free="Lead Free", Length=3mm, Lifecycle Status=Production, Max Operating Temperature=150°C, Mounting Technology="Surface Mount", Number of Channels=1, Number of Elements=1, Number of Terminals=3, Pins=3, Power Dissipation=1.08W, Radiation Hardening=No, Rds On Max=65mΩ, REACH SVHC=Yes, Rise Time=5ns, RoHS=Compliant, Schedule B="8541290080, 8541290080", Turn-Off Delay Time=31ns, Turn-On Delay Time=4.8ns, Weight=7.994566mg, Width=1.4mm
Q2: library part TSR0028-1, "Trans MOSFET N-CH 30V 5.7A 3-Pin SOT-23", Case/Package=SOT-23, Continuous Drain Current (ID)=5.7A, Drain to Source Breakdown Voltage=30V, Drain to Source Resistance=26.5mΩ, Gate to Source Voltage (Vgs)=12V, Input Capacitance=630pF, Max Junction Temperature (Tj)=150°C, Max Power Dissipation=1.4W, Min Operating Temperature=-55°C, Threshold Voltage=650mV, Drain to Source Voltage (Vdss)=30V, Export Control Classification Number (ECCN) Code=EAR99, Height=1.25mm, Introduction Date=2007-04-17, Lead Free="Lead Free", Lifecycle Status=Production, Max Operating Temperature=150°C, Min Breakdown Voltage=30V, Mounting Technology="Surface Mount", Number of Channels=1, Number of Elements=1, Number of Terminals=3, Pins=3, Power Dissipation=1.4W, Radiation Hardening=No, Rds On Max=26.5mΩ, REACH SVHC=Yes, RoHS=Compliant, Schedule B="8541290080, 8541290080", Turn-Off Delay Time=25ns, Turn-On Delay Time=3ns
R1: library part RES0073-11, "RES SMD 330R OHM ±1% 1/16W 0402", Package=0402, Power=1/16W, Tolerance=1%, ClassName=CHIP_MICRO, Generic Allowed=Yes
R2 R3 R4 R5: library part RES0003-8, "RES SMD 0R OHM ±1% 1/10W 0603", Package=0603, Power=1/10W, Tolerance=1%, ClassName=CHIP_MICRO, Generic Allowed=Yes
R6: library part RES0219-8, "RES SMD 10K OHM ±1% 1/10W 0603", Package=0603, Power=1/10W, Tolerance=1%, ClassName=CHIP_MICRO, Generic Allowed=Yes, Subtype="Thick Film"
R7: library part RES0224-8, "RES SMD 100K OHM ±1% 1/10W 0603", Package=0603, Power=1/10W, Tolerance=1%, ClassName=CHIP_MICRO, Generic Allowed=Yes, Subtype="Thick Film"
R8: library part RES0105-8, "RES SMD 1K OHM ±0 .1% 1/10W 0603", Package=0603, Power=1/10W, Tolerance="0 .1%", ClassName=CHIP_OTHER, Generic Allowed=Yes
S1: library part SWH0003-1, "SW, Tactile 15V@20mA, EVQ-PF, Through Hole, R/A, 7.5x7.1x5.85mm", ClassName=COMP_OTHER, Generic Allowed=Yes, Package=EVQ-PF206K
TP1: library part PAD0035-2, "40mil 1mm SMD Test Point", ClassName=PCB_PATTERN, Shape=Round
U1: library part ICT0297-2, "Overvoltage Protection Controllers with Reverse Polarity Protection", Case/Package=SOT-23, Manufacturer Lifecycle Status=PRODUCTION, Max Junction Temperature (Tj)=150°C, Max Operating Temperature=85°C, Max Power Dissipation=696mW, Max Supply Voltage=28V, Min Operating Temperature=-40°C, Min Supply Voltage=1.2V, Nominal Supply Current=77µA, Height=1.45mm, Lifecycle Status=Production, Mounting Technology="Surface Mount", Number of Channels=1, Number of Outputs=1, Pins=6, Radiation Hardening=No, RoHS=Compliant
U2 U4: library part ICT0294-1, "8mA 8 4.5V~5.5V 8mA 1 TSSOP-20 Buffer/Driver/Transceiver ROHS", Ambient Temperature Range High=125°C, Case/Package=TSSOP, High Level Output Current=-8mA, Low Level Output Current=8mA, Manufacturer Lifecycle Status=ACTIVE, Max Supply Voltage=5.5V, Min Operating Temperature=-40°C, Min Supply Voltage=4.5V, Nominal Supply Current=4µA, Operating Supply Voltage=5V, Contact Plating=Gold, Direction=Bidirectional, Height=0m, Lead Free="Lead Free", Length=6.5mm, Lifecycle Status=Production, Logic Function="Inverting, Transceiver", Max Operating Temperature=125°C, Mounting Technology="Surface Mount", Number of Bits=8, Number of Bits per Element=8, Number of Channels=8, Number of Circuits=1, Number of Elements=1, Number of Inputs=8, Number of Outputs=8, Pins=20, Polarity=Non-Inverting, Propagation Delay=5.3ns, Quiescent Current=4µA, Radiation Hardening=No, REACH SVHC=No, RoHS=Compliant, Schedule B="8542390000, 8542390000", Thickness=1mm, Turn-On Delay Time=16.5ns, Weight=76.997305mg, Width=4.4mm
U3: library part MOD0041-1, "ESP32-S3-Pico Module."
U5: library part CMP-00035-1, "Mic Omni-Directional -26dB 3.63V Rectangular Solder Pad T/R", Max Operating Temperature=85°C, Max Supply Voltage=3.63V, Min Operating Temperature=-40°C, Min Supply Voltage=1.65V, Operating Supply Current=550µA, Direction=Omnidirectional, Height=980µm, Length=3.5mm, Lifecycle Status=Production, Max Length=3.6mm, Max Thickness=1.08mm, Max Width=2.75mm, Min Length=3.4mm, Min Thickness=880µm, Min Width=2.55mm, Output Type=Digital, RoHS=Compliant, Schedule B="8518100000, 8518100000", Width=2.65mm

## Via types
v1: diameter 0.5, hole 0.25, Top Layer to Bottom Layer, tented both sides, 418 vias
v2: diameter 0.5, hole 0.25, Top Layer to Bottom Layer, 217 vias

## Nets (pads, with @x,y where several pads share a name; then routed paths per layer and width w, separated by ;. In a path a pad name is that pad's centre, name@x,y a point inside that pad or via, vN(x,y) a via of type N, cw(c..) or ccw(c..) an arc to the next point about the centre after c; other vN are vias at no path point)
+3V3: C5.1 R6.1 U3.36 U5.5 | length 25.8
  Top Layer w0.254: U3.36 9.04,-15.64 8.365,-14.965 R6.1 8.613,-13.752 8.948,-13.752 C5.1@21.87,-0.83 ; C5.1 21.844,-0.693 U5.5
+5V: C3.1 C4.1 D2.K U2.20 U3.39 U4.20 | length 110
  Top Layer w1.524: v1@1.4,-22.7 v1(1.4,-22.3) 1.4,-18.52 U3.39
  Layer 2 w0.762: v1(1.4,-22.945) 5.945,-22.945 v1(7.3,-24.3)
  Layer 2 w2.032: v1(1.4,-22.945) 1.4,-45.7 0.1,-47 0.1,-57.2 5.1,-62.2 23.4,-62.2 24.8,-62.2 37,-50 v1(37,-35.4) v1(37,-34.8)
  Bottom Layer w0.508: v1(7.3,-24.3) C4.1 7.3,-26.631 7.344,-26.675 U4.20
  Bottom Layer w0.762: v1(37,-35.4) v1(37,-34.8) C3.1 37,-32.6
  other v1: 22.8,-62.7 23.5,-62.7 22.1,-62.6 22.1,-61.9 22.8,-61.9 23.4,-61.9
+5V_OUT: C1.1 C2.1 D2.A H1.1 Q2.2 R1.2 | length 32.7
  Top Layer w0.254: R1.2 19.626,-60.25 22.617,-57.259 22.617,-57.188 22.945,-56.86 D2.A
  Top Layer w1.397: Q2.2 23.05,-56.81 D2.A ; C2.1 C2.1@41.613,-54.512 ; H1.1@48.388,-54.512 H1.1
  Top Layer w1.778: D2.A 27.24,-56.86 29.475,-54.625 36.4,-54.625 ; 36.4,-54.6 C2.1@41.6,-54.6 ; C2.1@41.613,-54.512 H1.1@48.388,-54.512
BUTTON: C6.1 R6.2 R8.1 U3.17 | length 83
  Top Layer w0.152: v1(6.7,-15.2) 6.7,-14.065 R6.2 C6.1 6.765,-10.313 R8.1 ; v1(39.5,-40.1) 39.5,-37.9 U3.17
  Bottom Layer w0.152: v1(6.7,-15.2) -2.2,-24.1 -2.2,-40.8 -0.4,-42.6 10.6,-42.6 14.3,-46.3 33.3,-46.3 v1(39.5,-40.1)
DC_IN: J1.+ Q1.3 | length 7.5
  Top Layer w1.397: J1.+ 15.082,-51 15.9,-51.818 Q1.3
GND: C1.2 C2.2 C3.2 C4.2 C5.2 C6.2 D1.K H1.2 H2.4 H2.8 H2.16 J1.- R2.1 R3.1 R4.1 R5.2 R7.2 S1.2 U1.2 U1.6 U2.1 U2.10 U2.19 U3.3 U3.8 U3.13 U3.18 U3.23 U3.28 U3.33 U3.38 U4.1 U4.10 U4.19 U5.2 U5.3 | length 51.7
  Top Layer w0.254: v1(4,-40.08) v1(4,-35.68) ; v1(4,-20.7) v1(4,-16.3) ; C6.2 8.373,-12.1 v1(9.4,-12.1) ; v1(15.569,-59.45) 15.594,-59.475 15.594,-60.225 D1.K ; U3.8 16.7,-37.92 v1(16.7,-40.08) ; v1@16.7,-20.7 v1(16.7,-16.3) ; v1(18.6,-54.2) 18.647,-54.153 18.647,-53.98 19.05,-53.577 U1.6 ; v1(19.8,-56.9) 19.8,-56.838 20,-56.638 U1.2 ; C5.2 v1(21.78,1.971) ; 24.664,2.043 24.7,2.079 v1(24.7,2.7) ; U5.2 25.601,0.15 26.359,0.15 v1(26.38,0.171) ; R7.2 v1(27.58,-2.829) ; U3.28 29.4,-18.46 v1(29.4,-16.3) ; v1(29.4,-40.08) v1(29.4,-35.68) ; C1.2 38.575,-51.875 39.223,-51.227 39.223,-50.744 39.5,-50.467 v1(39.5,-50.4) ; C2.2 v1(41.6,-50.6) ; U3.18 42.1,-37.92 v1(42.1,-39.9) ; U3.23 42.1,-18.46 v1(42.1,-16.3)
  Bottom Layer w0.254: C4.2 v1(5.7,-24.6) ; v1(9.3,-35.3) R5.2 ; v1(11,-33.4) 11.047,-33.447 11.047,-33.747 R4.1 ; U4.1 13.2,-26.65 v1(13.2,-26.1) ; v1(23.3,-31.6) 25.115,-31.6 H2.8 ; v1(23.4,-26.4) 24.995,-26.4 H2.4 ; H2.16 26.613,-41.78 26.733,-41.9 v1(26.8,-41.9) ; v1(31.2,-32.9) 31.2,-32.35 U2.1 ; v1(31.2,-25.9) 31.2,-26.45 U2.10 ; R2.1 31.673,-25.273 32.006,-25.273 32.133,-25.4 v1(32.2,-25.4) ; v1(34.6,-33.7) C3.2 ; R3.1 v1(35.3,-24.3) ; v1(35.4,-31.7) 35.412,-31.688 36.963,-31.688 U2.19
  other v1: -1.8,-68.4 -0.2,-68.4 1.4,-68.4 3,-68.4 4.6,-68.4 6.2,-68.4 7.8,-68.4 9.4,-68.4 11,-68.4 12.6,-68.4 14.2,-68.4 15.8,-68.4 17.4,-68.4 19,-68.4 20.6,-68.4 22.2,-68.4 23.8,-68.4 25.4,-68.4 27,-68.4 28.6,-68.4 30.2,-68.4 31.8,-68.4 33.4,-68.4 35,-68.4 36.6,-68.4 38.2,-68.4 39.8,-68.4 41.4,-68.4 43,-68.4 44.6,-68.4 46.2,-68.4 47.8,-68.4 49.4,-68.4 51,-68.4 -3.1,-68.1 52.8,-67.9 -3.4,-66.5 53.3,-66.5 -3.4,-64.9 22.5,-64.4 19.2,-64.3 15.6,-64.2 11.6,-64.1 26,-64.1 7.3,-64 3.7,-63.7 -3.4,-63.3 53.3,-63.3 28.3,-62.6 -3.4,-61.7 53.3,-61.7 0.8,-61 30.6,-60.3 -3.4,-60.1 9.1,-60.1 12.4,-60.1 53.3,-60.1 21.4,-60 5.9,-59.9 -1.4,-59.2 19.2,-58.8 24.8,-58.8 -3.4,-58.5 53.3,-58.5 17.2,-58.3 3.7,-58 33.1,-57.9 38,-57 -3.4,-56.9 11.4,-56.9 42.1,-56.9 53.3,-56.9 46.8,-56.6 50,-56.5 2.2,-56.3 24.5,-55.4 -3.4,-55.3 26.4,-55.3 53.3,-55.3 -1.7,-54.8 50.8,-54.2 1.9,-53.8 14.1,-53.8 -3.4,-53.7 26.5,-53.7 53.3,-53.7 11.3,-53.4 8.7,-53 31,-52.9 28.3,-52.8 13.6,-52.4 48.9,-52.3 45.2,-52.2 -3.4,-52.1 53.3,-52.1 21.7,-51.8 -1.7,-51.6 26.1,-51.6 1.7,-51.2 7.8,-50.7 17,-50.6 -3.4,-50.5 24.6,-50.5 30.5,-50.5 53.3,-50.5 27.8,-50.4 33.4,-50.4 15.1,-49.6 18.2,-49.6 13,-49.4 22.4,-49 25.2,-49 28.7,-49 32.3,-49 -3.4,-48.9 8.6,-48.9 53.3,-48.9 11,-48.6 -1.9,-48.3 16.9,-48.3 19.5,-48.2 2.5,-48 23.8,-47.7 26.9,-47.7 30.3,-47.7 34.2,-47.6 15,-47.5 -3.4,-47.3 53.3,-47.3 39.5,-47.2 12.8,-46.1 -3.4,-45.7 53.3,-45.7 3.5,-45.6 23.6,-45.6 17.7,-45.5 27.3,-45.5 20.4,-45.4 31.8,-45.3 -1.1,-45.2 15.5,-45.2 41.4,-45.2 39.1,-45.1 8,-44.7 -3.4,-44.1 53.3,-44.1 13,-44 3.5,-43.5 43.5,-43.2 -1.6,-43.1 34.2,-43.1 17.1,-42.9 28.7,-42.9 41.3,-42.9 39.4,-42.6 -3.4,-42.5 53.3,-42.5 11.7,-42.1 22.9,-42 15.4,-41.8 10.2,-41.1 41,-41.1 45.5,-41.1 7.8,-41 32,-41 -3.4,-40.9 53.3,-40.9 47.4,-40.8 5.1,-40.7 43.4,-40.7 25.2,-40.5 13.1,-40.4 -3,-40 -3.4,-39.3 53.3,-39.3 -3.4,-37.7 53.3,-37.7 -3.4,-36.1 -0.362,-35.488 11.4,-35.5 6.5,-35.4 7.7,-35.4 18.1,-35.4 25.1,-35.4 27.6,-35.4 19,-35.2 12.8,-35.1 -3.4,-34.5 22.121,-34.5 40.3,-34.4 3.6,-33.7 6.4,-33.5 -1.1,-33.3 9.1,-33.1 -3.4,-32.9 19.1,-32.9 11,-32.2 28.6,-32.2 4.7,-32.1 3.15,-31.392 -3.4,-31.3 -0.5,-31.3 40.2,-31.1 28.6,-30.9 21.1,-30.5 9.6,-30.3 4.338,-30.185 -3.4,-29.7 28.6,-29.7 11.1,-29 23.079,-29 4.3,-28.7 -3.4,-28.1 10,-27.9 -0.5,-27.8 20.9,-27.8 5.6,-27.6 16.8,-27.4 28,-27.1 3.5,-26.9 -3.4,-26.5 5.6,-26.4 27,-25.9 9.2,-25.7 17.2,-25.2 21.4,-25.2 -3.4,-24.9 3.5,-24.7 14.2,-24.4 8.6,-23.5 -0.5,-23.4 -3.4,-23.3 15.8,-23.1 22.1,-22.7 28,-22.5 36,-22.3 25.2,-22.2 32.6,-22.2 39.3,-22.2 -3.4,-21.7 30.3,-21.6 12.1,-21.5 20.6,-21.3 9,-21.2 26.6,-21.2 5.4,-20.9 16.7,-20.9 37.8,-20.9 40.3,-20.9 28.4,-20.7 33.2,-20.6 35.2,-20.6 -3.4,-20.1 -3.4,-18.5 53.3,-18.5 -3.4,-16.9 53.3,-16.9 7.7,-16 10,-16 45.7,-15.9 43.2,-15.7 -3.4,-15.3 53.3,-15.3 13.2,-15.1 35.7,-15.1 23.2,-14.9 32.9,-14.9 25.4,-14.8 29.3,-14.8 21.1,-14.6 15.8,-14.3 18.7,-14.3 -3.4,-13.7 53.3,-13.7 4.9,-13.5 -3.4,-12.1 53.3,-12.1 14.4,-11.6 -3.4,-10.5 53.3,-10.5 4,-9.8 8.8,-9.8 -0.1,-9.7 -3.4,-8.9 53.3,-8.9 12.6,-7.6 -3.4,-7.3 53.3,-7.3 4.8,-6.8 -3.4,-5.7 53.3,-5.7 -3.4,-4.1 53.3,-4.1 23.68,-4.029 20.68,-3.729 -3.4,-2.5 53.3,-2.5 17.28,-2.429 53.4,-1.1 -3.4,-0.9 -3.4,0.7 53.4,1 -3.3,2.3 53.3,2.3 -2.7,3.5 -1.1,3.5 0.5,3.5 2.1,3.5 3.7,3.5 5.3,3.5 6.9,3.5 8.5,3.5 10.1,3.5 11.7,3.5 13.3,3.5 14.9,3.5 16.5,3.5 18.1,3.5 19.7,3.5 21.3,3.5 22.9,3.5 24.5,3.5 26.1,3.5 27.7,3.5 29.3,3.5 30.9,3.5 32.5,3.5 34.1,3.5 35.7,3.5 37.3,3.5 38.9,3.5 40.5,3.5 42.1,3.5 43.7,3.5 45.3,3.5 46.9,3.5 48.5,3.5 50.1,3.5 51.7,3.5 53.1,3.5
  other v2: 4.137,-67.487 7.137,-67.487 10.137,-67.487 13.137,-67.487 16.137,-67.487 19.137,-67.487 22.137,-67.487 25.137,-67.487 28.137,-67.487 31.137,-67.487 34.137,-67.487 37.137,-67.487 40.137,-67.487 43.137,-67.487 46.137,-67.487 5.637,-64.487 8.637,-64.487 14.637,-64.487 17.637,-64.487 20.637,-64.487 23.637,-64.487 26.637,-64.487 29.637,-64.487 32.637,-64.487 35.637,-64.487 38.637,-64.487 41.637,-64.487 44.637,-64.487 -1.863,-61.487 28.137,-61.487 31.137,-61.487 34.137,-61.487 37.137,-61.487 40.137,-61.487 43.137,-61.487 46.137,-61.487 49.137,-61.487 52.137,-61.487 5.637,-58.487 8.637,-58.487 11.637,-58.487 14.637,-58.487 23.637,-58.487 32.637,-58.487 35.637,-58.487 38.637,-58.487 41.637,-58.487 44.637,-58.487 47.637,-58.487 50.637,-58.487 -1.863,-55.487 4.137,-55.487 10.137,-55.487 13.137,-55.487 25.137,-55.487 52.137,-55.487 2.637,-52.487 14.637,-52.487 26.637,-52.487 29.637,-52.487 44.637,-52.487 47.637,-52.487 50.637,-52.487 -1.863,-49.487 7.137,-49.487 16.137,-49.487 19.137,-49.487 28.137,-49.487 31.137,-49.487 34.137,-49.487 40.137,-49.487 43.137,-49.487 46.137,-49.487 52.137,-49.487 2.637,-46.487 5.637,-46.487 8.637,-46.487 11.637,-46.487 38.637,-46.487 41.637,-46.487 44.637,-46.487 47.637,-46.487 50.637,-46.487 4.137,-43.487 7.137,-43.487 10.137,-43.487 16.137,-43.487 19.137,-43.487 22.137,-43.487 25.137,-43.487 28.137,-43.487 40.137,-43.487 46.137,-43.487 49.137,-43.487 52.137,-43.487 -0.363,-40.487 26.637,-40.487 32.637,-40.487 41.637,-40.487 44.637,-40.487 50.637,-40.487 28.137,-37.487 43.137,-37.487 49.137,-37.487 52.137,-37.487 17.637,-34.487 29.637,-34.487 32.637,-34.487 10.137,-31.487 34.137,-31.487 -0.363,-28.487 17.637,-28.487 10.137,-25.487 16.137,-25.487 19.137,-25.487 8.637,-22.487 11.637,-22.487 23.637,-22.487 28.137,-19.487 43.137,-19.487 49.137,-19.487 52.137,-19.487 2.637,-16.487 35.637,-16.487 38.637,-16.487 50.637,-16.487 -1.863,-13.487 4.137,-13.487 10.137,-13.487 13.137,-13.487 16.137,-13.487 19.137,-13.487 22.137,-13.487 28.137,-13.487 31.137,-13.487 34.137,-13.487 37.137,-13.487 40.137,-13.487 43.137,-13.487 46.137,-13.487 49.137,-13.487 52.137,-13.487 -0.363,-10.487 2.637,-10.487 5.637,-10.487 8.637,-10.487 14.637,-10.487 17.637,-10.487 20.637,-10.487 23.637,-10.487 26.637,-10.487 29.637,-10.487 32.637,-10.487 35.637,-10.487 38.637,-10.487 41.637,-10.487 44.637,-10.487 47.637,-10.487 50.637,-10.487 4.137,-7.487 7.137,-7.487 10.137,-7.487 16.137,-7.487 19.137,-7.487 22.137,-7.487 28.137,-7.487 31.137,-7.487 34.137,-7.487 37.137,-7.487 40.137,-7.487 43.137,-7.487 46.137,-7.487 49.137,-7.487 52.137,-7.487 -0.363,-4.487 2.637,-4.487 5.637,-4.487 8.637,-4.487 11.637,-4.487 14.637,-4.487 20.637,-4.487 26.637,-4.487 29.637,-4.487 32.637,-4.487 35.637,-4.487 38.637,-4.487 41.637,-4.487 44.637,-4.487 47.637,-4.487 50.637,-4.487 4.137,-1.487 7.137,-1.487 10.137,-1.487 13.137,-1.487 16.137,-1.487 19.137,-1.487 28.137,-1.487 31.137,-1.487 34.137,-1.487 37.137,-1.487 40.137,-1.487 43.137,-1.487 46.137,-1.487 5.637,1.513 8.637,1.513 11.637,1.513 14.637,1.513 17.637,1.513 20.637,1.513 23.637,1.513 26.637,1.513 29.637,1.513 32.637,1.513 35.637,1.513 38.637,1.513 41.637,1.513 44.637,1.513
MIC_BCLK: U3.7 U5.4 | length 50.5
  Top Layer w0.152: v1(22.855,0.147) 22.864,0.138 23.771,0.138 U5.4
  Top Layer w0.254: v1(14.1,-40.2) 14.1,-37.9 U3.7
  Layer 2 w0.152: v1(14.1,-40.2) 14.1,-34.7 11.6,-32.2 11.6,-25.9 12.621,-24.879 14.698,-24.879 18,-21.577 18,-16.4 22.855,-11.545 v1(22.855,0.147)
MIC_DOUT: R7.1 U3.10 U5.6 | length 42.9
  Top Layer w0.152: U5.6 24.68,-1.543 24.98,-1.843 R7.1 v1(24.98,-3.829)
  Top Layer w0.254: U3.10 21.74,-38.728 22.553,-39.541 22.553,-39.953 v1(22.6,-40)
  Layer 2 w0.152: v1(22.6,-40) 22.6,-16.5 24.98,-14.12 v1(24.98,-3.829)
MIC_LRCL: U3.9 U5.1 | length 45.9
  Top Layer w0.152: v1(25.466,-1.579) 25.513,-1.532 25.513,-0.761 U5.1
  Top Layer w0.254: v1(19.2,-40.3) U3.9
  Layer 2 w0.152: v1(19.2,-40.3) 20.3,-40.3 21.579,-39.021 21.579,-26.505 20.921,-25.848 20.921,-21.655 21.079,-21.498 21.079,-15.921 24.2,-12.8 24.2,-2.845 v1(25.466,-1.579)
NetD1_A: D1.A R1.1 | length 2.2
  Top Layer w0.254: D1.A R1.1
NetQ1_1: Q1.1 U1.5 | length 13.2
  Top Layer w0.762: Q1.1 15,-55.392 v1(15,-56.6) v1(15.593,-56.6) v1(16.243,-56.6) ; v1(20,-54.2) U1.5 v1(20,-52.645) v1(20,-52)
  Bottom Layer w0.762: v1(15,-56.6) v1(15.593,-56.6) v1(16.243,-56.6) 18.193,-56.6 20,-54.793 v1(20,-52.645) v1(20,-52)
NetQ1_2: Q1.2 Q2.3 U1.1 | length 15.9
  Top Layer w1.016: 18.097,-55.398 16.836,-55.398 Q1.2 17.028,-55.377 17.59,-54.815 17.59,-52.31 19.3,-50.6 22.95,-50.6 25.056,-52.706 25.056,-54.305 Q2.3 ; 18.597,-55.398 U1.1@18.842,-55.643
NetQ2_1: Q2.1 U1.4 | length 1.8
  Top Layer w1.397: 21.355,-53.255 22.855,-53.255 Q2.1
NetR2_2: R2.2 U2.9 | length 3.4
  Bottom Layer w0.152: R2.2 29.8,-26.8 30.125,-27.125 U2.9
NetR3_2: R3.2 U2.11 | length 1.5
  Bottom Layer w0.152: R3.2 36.975,-25.075 U2.11
NetR4_2: R4.2 U4.8 U4.9 | length 4.7
  Bottom Layer w0.152: R4.2 12.288,-33.388 11.8,-32.9 11.8,-32.117 12.042,-31.875 U4.9 U4.8
NetR5_1: R5.1 U4.11 U4.12 | length 2.6
  Bottom Layer w0.152: U4.12 U4.11 7.576,-32.525 7.7,-32.649 R5.1
NetR8_2: R8.2 S1.1 | length 9.3
  Top Layer w0.152: S1.1 -0.81,-8.69 R8.2
NetTP1_1: TP1.1 U1.3 | length 1.5
  Top Layer w0.254: U1.3 20.975,-55.77 20.975,-57.175 TP1.1
PICO_RGB_A: U3.32 U4.18 | length 19.9
  Top Layer w0.152: U3.32 v1(19.2,-16.1)
  Bottom Layer w0.152: U4.18 8.709,-27.975 19.2,-17.484 v1(19.2,-16.1)
PICO_RGB_B: U2.12 U3.34 | length 31.5
  Top Layer w0.152: v1(14.1,-16.1) 14.1,-18.48 U3.34
  Bottom Layer w0.152: v1(14.1,-16.1) 15.3,-14.9 19.4,-14.9 27.9,-23.4 32.8,-23.4 34.2,-24.8 34.2,-26 35.325,-27.125 U2.12
PICO_RGB_B1: U2.16 U3.26 | length 21.1
  Top Layer w0.152: v1(34.4,-16) 34.4,-18.46 U3.26
  Bottom Layer w0.152: v1(34.4,-16) 40.3,-21.9 40.3,-28.1 38.675,-29.725 U2.16
PICO_RGB_B2: U2.13 U3.31 | length 27.4
  Top Layer w0.152: v1(21.7,-16) 21.7,-18.46 U3.31
  Bottom Layer w0.152: v1(21.7,-16) 22.6,-16 29.6,-23 36.7,-23 38.6,-24.9 38.6,-27.4 38.225,-27.775 U2.13
PICO_RGB_C: U3.35 U4.17 | length 20
  Top Layer w0.152: U3.35 11.6,-18.48 v1(11.6,-16.2)
  Bottom Layer w0.152: U4.17 5.325,-28.625 4.6,-27.9 4.6,-23.2 v1(11.6,-16.2)
PICO_RGB_CLK: U3.2 U4.15 | length 21.2
  Top Layer w0.152: U3.2 1.42,-39.62 v1(3.6,-41.8)
  Bottom Layer w0.152: v1(3.6,-41.8) 1.5,-39.7 1.5,-33.8 5.375,-29.925 U4.15
PICO_RGB_D: U3.1 U4.16 | length 18.5
  Top Layer w0.152: v1(-1.2,-40.2) -1.2,-37.96 U3.1
  Bottom Layer w0.152: v1(-1.2,-40.2) -1.2,-35 4.525,-29.275 U4.16
PICO_RGB_G1: U2.18 U3.6 | length 41.4
  Top Layer w0.152: v1(11.5,-40.2) 11.5,-37.96 U3.6
  Bottom Layer w0.152: v1(11.5,-40.2) 15.5,-44.2 30.6,-44.2 39.1,-35.7 39.1,-31.9 38.225,-31.025 U2.18
PICO_RGB_G2: U2.14 U3.29 | length 23.9
  Top Layer w0.152: v1(26.8,-16.1) 26.8,-18.48 U3.29
  Bottom Layer w0.152: v1(26.8,-16.1) 32.025,-21.325 36.125,-21.325 39.1,-24.3 39.1,-27.7 38.375,-28.425 U2.14
PICO_RGB_LAT: U3.4 U4.14 | length 13.7
  Top Layer w0.152: v1(6.5,-40.1) U3.4
  Bottom Layer w0.152: v1(6.5,-40.1) 5.6,-39.2 5.6,-31 6.025,-30.575 U4.14
PICO_RGB_OE: U3.5 U4.13 | length 13.7
  Top Layer w0.152: U3.5 9.1,-37.94 v1(9.1,-40.2)
  Bottom Layer w0.152: U4.13 8.878,-31.225 10.1,-32.447 10.1,-39.2 v1(9.1,-40.2)
PICO_RGB_R1: U2.17 U3.25 | length 21.3
  Top Layer w0.152: U3.25 37,-18.48 v1(37,-16)
  Bottom Layer w0.152: U2.17 38.925,-30.375 40.9,-28.4 40.9,-19.9 v1(37,-16)
PICO_RGB_R2: U2.15 U3.27 | length 21
  Top Layer w0.152: v1(31.8,-16) 31.8,-18.4 U3.27
  Bottom Layer w0.152: v1(31.8,-16) 39.7,-23.9 39.7,-28 38.625,-29.075 U2.15
RGB_A: H2.9 U4.2 | length 11.4
  Bottom Layer w0.152: U4.2 15.125,-27.325 17.6,-29.8 17.6,-33.7 18.06,-34.16 H2.9
RGB_B: H2.10 U2.8 | length 12.5
  Layer 2 w0.152: v1(28,-34.1) 28,-28.2 28.8,-27.4 v1(29.4,-27.4)
  Bottom Layer w0.152: H2.10 25.195,-34.1 v1(28,-34.1) ; v1(29.4,-27.4) 29.775,-27.775 U2.8
RGB_B1: H2.3 U2.4 | length 16.5
  Layer 2 w0.152: v1(27.1,-31.5) v1(27.1,-27.7)
  Bottom Layer w0.152: H2.3 21.84,-26.54 23,-27.7 v1(27.1,-27.7) ; v1(27.1,-31.5) 29,-31.5 30.125,-30.375 U2.4
RGB_B2: H2.7 U2.7 | length 16.8
  Layer 2 w0.152: v1(29.2,-28.5) 29.217,-28.517 29.217,-32.917 v1(29.233,-32.933)
  Bottom Layer w0.152: H2.7 20.085,-31.62 21.365,-32.9 29.037,-32.9 29.07,-32.933 v1(29.233,-32.933) ; v1(29.2,-28.5) 29.237,-28.463 31.187,-28.463 U2.7
RGB_C: H2.11 U4.3 | length 13.4
  Bottom Layer w0.152: U4.3 14.875,-27.975 17.1,-30.2 17.1,-36 17.901,-36.801 19.384,-36.801 H2.11
RGB_CLK: H2.13 U4.5 | length 14.1
  Bottom Layer w0.152: U4.5 14.375,-29.275 15.9,-30.8 15.9,-37.1 17.936,-39.136 19.381,-39.136 H2.13
RGB_D: H2.12 U4.4 | length 19.9
  Bottom Layer w0.152: U4.4 14.525,-28.625 16.5,-30.6 16.5,-36.542 18.058,-38.1 23.135,-38.1 24.535,-36.7 H2.12
RGB_G1: H2.2 U2.2 | length 17.6
  Bottom Layer w0.152: H2.2 25.235,-23.9 32.552,-23.9 33.7,-25.048 33.7,-30.759 32.784,-31.675 U2.2
RGB_G2: H2.6 U2.6 | length 6.1
  Bottom Layer w0.152: H2.6 25.14,-29.075 U2.6
RGB_LAT: H2.14 U4.6 | length 21.2
  Bottom Layer w0.152: U4.6 14.325,-29.925 15.3,-30.9 15.3,-37.763 18.432,-40.895 22.88,-40.895 24.535,-39.24 H2.14
RGB_OE: H2.15 U4.7 | length 15.6
  Bottom Layer w0.152: U4.7 14.275,-30.575 14.7,-31 14.7,-39 17.48,-41.78 H2.15
RGB_R1: H2.1 U2.3 | length 22.3
  Bottom Layer w0.152: H2.1 22.75,-24 23.95,-25.2 28.1,-25.2 28.995,-24.305 32.105,-24.305 32.171,-24.371 33.1,-25.3 33.1,-30.7 32.775,-31.025 U2.3
RGB_R2: H2.5 U2.5 | length 12.5
  Bottom Layer w0.152: H2.5 21.38,-29.08 22.6,-30.3 29.339,-30.3 29.914,-29.725 U2.5
pads on no net: J1.SW MH1.1 MH2.1 MH3.1 MH4.1 S1.0 U3.11 U3.12 U3.14 U3.15 U3.16 U3.19 U3.20 U3.21 U3.22 U3.24 U3.30 U3.37 U3.40 U5.

## Polygon pours and split planes (outlines as drawn)
GND on Top Layer "GND_L01_P005" (solid, pour order 5): -4,-67.824 ccw(c-2.824,-67.824) -2.824,-69 -2.827,-69 52.489,-69 52.489,-68.992 ccw(c52.489,-67.539) 53.942,-67.539 53.942,3.241 ccw(c52.967,3.241) 52.967,4.216 52.967,4.225 -2.824,4.225 ccw(c-2.824,3.049) -4,3.049
+5V on Top Layer "+5V_L01_P003" (solid, pour order 3): 23.71,-59.685 22.49,-59.685 22.49,-60.595 21.5,-61.585 21.5,-63.2 21.7,-63.4 23.9,-63.4 24.1,-63.2 24.1,-61.6 23.915,-60.8 23.71,-60.595
GND on Layer 2 "GND_L03_P002" (solid, pour order 2): -4,-67.824 ccw(c-2.824,-67.824) -2.824,-69 -2.827,-69 52.489,-69 52.489,-68.992 ccw(c52.489,-67.539) 53.942,-67.539 53.942,3.241 ccw(c52.967,3.241) 52.967,4.216 52.967,4.225 -2.824,4.225 ccw(c-2.824,3.049) -4,3.049
GND on Bottom Layer "GND_L04_P004" (solid, pour order 4): -4,-67.824 ccw(c-2.824,-67.824) -2.824,-69 -2.827,-69 52.489,-69 52.489,-68.992 ccw(c52.489,-67.539) 53.942,-67.539 53.942,3.241 ccw(c52.967,3.241) 52.967,4.216 52.967,4.225 -2.824,4.225 ccw(c-2.824,3.049) -4,3.049
GND on Layer 1 "GND_L02_P006" (solid, pour order 6): -4,-67.824 ccw(c-2.824,-67.824) -2.824,-69 -2.827,-69 52.489,-69 52.489,-68.992 ccw(c52.489,-67.539) 53.942,-67.539 53.942,3.241 ccw(c52.967,3.241) 52.967,4.216 52.967,4.225 -2.824,4.225 ccw(c-2.824,3.049) -4,3.049

## Keep-outs
Keep-Out Layer:
  rectangle: 41.3,-36 53.942,-20.3

## Silkscreen, mask and mechanical layers (free items; w line width, h text height)
Top Overlay:
  text "-" at 47.8,-45.562 h5
  text "+" at 47.3,-61.017 h5
  text "LED Matrix Board V3" at 9.1,-66.721 h3.5
Bottom Overlay:
  drawing of 11 lines, arcs and shapes, not listed
Fab Notes:
  lines w0.1: 40.882,-83.761 40.882,-72.287 79.924,-72.287 79.924,-83.772 40.894,-83.772 ; 54.432,-83.737 54.432,-72.287 ; 54.432,-81.475 79.957,-81.475 ; 54.432,-79.186 79.957,-79.186 ; 54.432,-76.886 79.957,-76.886 ; 54.432,-74.586 79.957,-74.586 ; 72.407,-83.797 72.407,-81.497
  text "NOTES: UNLESS OTHERWISE SPECIFIED0" at -77.899,8.301 h1.52
  text "1. SPECIFICATIONS/TOLERANCES:" at -77.899,6.523 h1.52
  text "A. FABRICATE PER IPC-6012, CLASS 2, USING PROVIDED DATA FILES XXXXXXXX.ZIP" at -77.899,4.745 h1.52
  text "B. ALL SPECIFICATIONS USED SHALL BE PER THEIR LATEST REVISIONS." at -77.899,2.967 h1.52
  text "C. THE DIMENSIONS OF CIRCUIT FEATURES IN THE PROVIDED DATA MAY BE ADJUSTED" at -77.899,1.189 h1.52
  text "ONLY TO COMPENSATE FOR PROCESS TOLERANCES; ADDING, REMOVING OR RELOCATING" at -77.899,-0.589 h1.52
  text "CIRCUIT FEATURES IS NOT ALLOWED" at -77.899,-2.367 h1.52
  text "D. REMOVE ALL BURRS AND BREAK SHARP EDGES, .381 [.015] MAX RADIUS." at -77.899,-4.145 h1.52
  text "E. PARENTHETICAL INFORMATION IS FOR REFERENCE ONLY." at -77.899,-5.923 h1.52
  text "F. REPAIR OF PCB DEFECTS IS NOT PERMITTED." at -77.899,-7.701 h1.52
  text "2. DIELECTRIC MATERIAL:" at -77.9,-11.257 h1.52
  text "A. DIELECTRIC MATERIAL SHALL BE PER IPC-4101/99, /124, /126 OR /129 (RoHS COMPLIANT EPOXY-GLASS)" at -77.899,-13.035 h1.52
  text "B. MINIMUM DIELECTRIC THICKNESS SHALL BE .051 [.002] FOR REFERENCED STACK-UP" at -77.899,-14.813 h1.52
  text "DIMENSIONS OF.076 [.003] OR GREATER; IPC-6012 REQUIREMENTS SHALL OTHERWISE" at -77.899,-16.591 h1.52
  text "APPLY. SINGLE-PLY CONSTRUCTION IS ALLOWED." at -77.899,-18.369 h1.52
  text "C. SEE LAYER STACK-UP FOR REQUIRED COPPER WEIGHTS AND THE FINISHED PCB" at -77.899,-20.147 h1.52
  text "THICKNESS. IF SPECIFIED, 1/3 OZ. STARTING FOIL MAY BE ACHIEVED BY 1/2 OZ. FOIL REDUCTION." at -77.899,-21.925 h1.52
  text "D. FINISHED PCB THICKNESS SHALL BE MEASURED OVER LANDS AND/OR" at -77.899,-23.703 h1.52
  text "CONDUCTORS NOT COVERED BY SOLDER MASK. IF SPECIFIED, 1/3 OZ. STARTING FOIL" at -77.899,-25.481 h1.52
  text "MAY BE ACHIEVED BY 1/2 OZ. FOIL REDUCTION." at -77.899,-27.259 h1.52
  text "3. DRILLING:" at -77.899,-30.815 h1.52
  text "A. VIA DIAMETERS SHALL BE VERIFIED BEFORE PLATING; ALL OTHER HOLE" at -77.899,-32.593 h1.52
  text "DIAMETERS ARE FINISHED DIMENSIONS." at -77.899,-34.371 h1.52
  text "B. LAYER-TO-LAYER MISREGISTRATION SHALL BE .127 [.005] MAXIMUM." at -77.899,-36.149 h1.52
  text "4. SOLDER MASK:" at -77.899,-39.705 h1.52
  text "A. APPLY LPI SOLDER MASK OVER BARE COPPER USING PROVIDED DATA." at -77.899,-41.483 h1.52
  text "B. SOLDER MASK SHALL BE PER IPC-SM-840, CLASS T, COLOR PURPLE." at -77.899,-43.261 h1.52
  text "C. THE DIMENSIONS OF SOLDER MASK-DEFINED PADS ON PLANES AND/OR WIDE" at -77.899,-45.039 h1.52
  text "CONDUCTORS SHALL NOT BE MODIFIED." at -77.899,-46.817 h1.52
  text "5. SILKSCREEN/MARKING:" at -77.899,-50.373 h1.52
  text "A. SILKSCREEN PCB PER PROVIDED DATA USING PERMANENT, NON-CONDUCTIVE" at -77.899,-52.151 h1.52